# EAGLE board Hormiga_877_CH340G_Rev_C-Panel (EAGLE 9.6.1), part 1 of 4
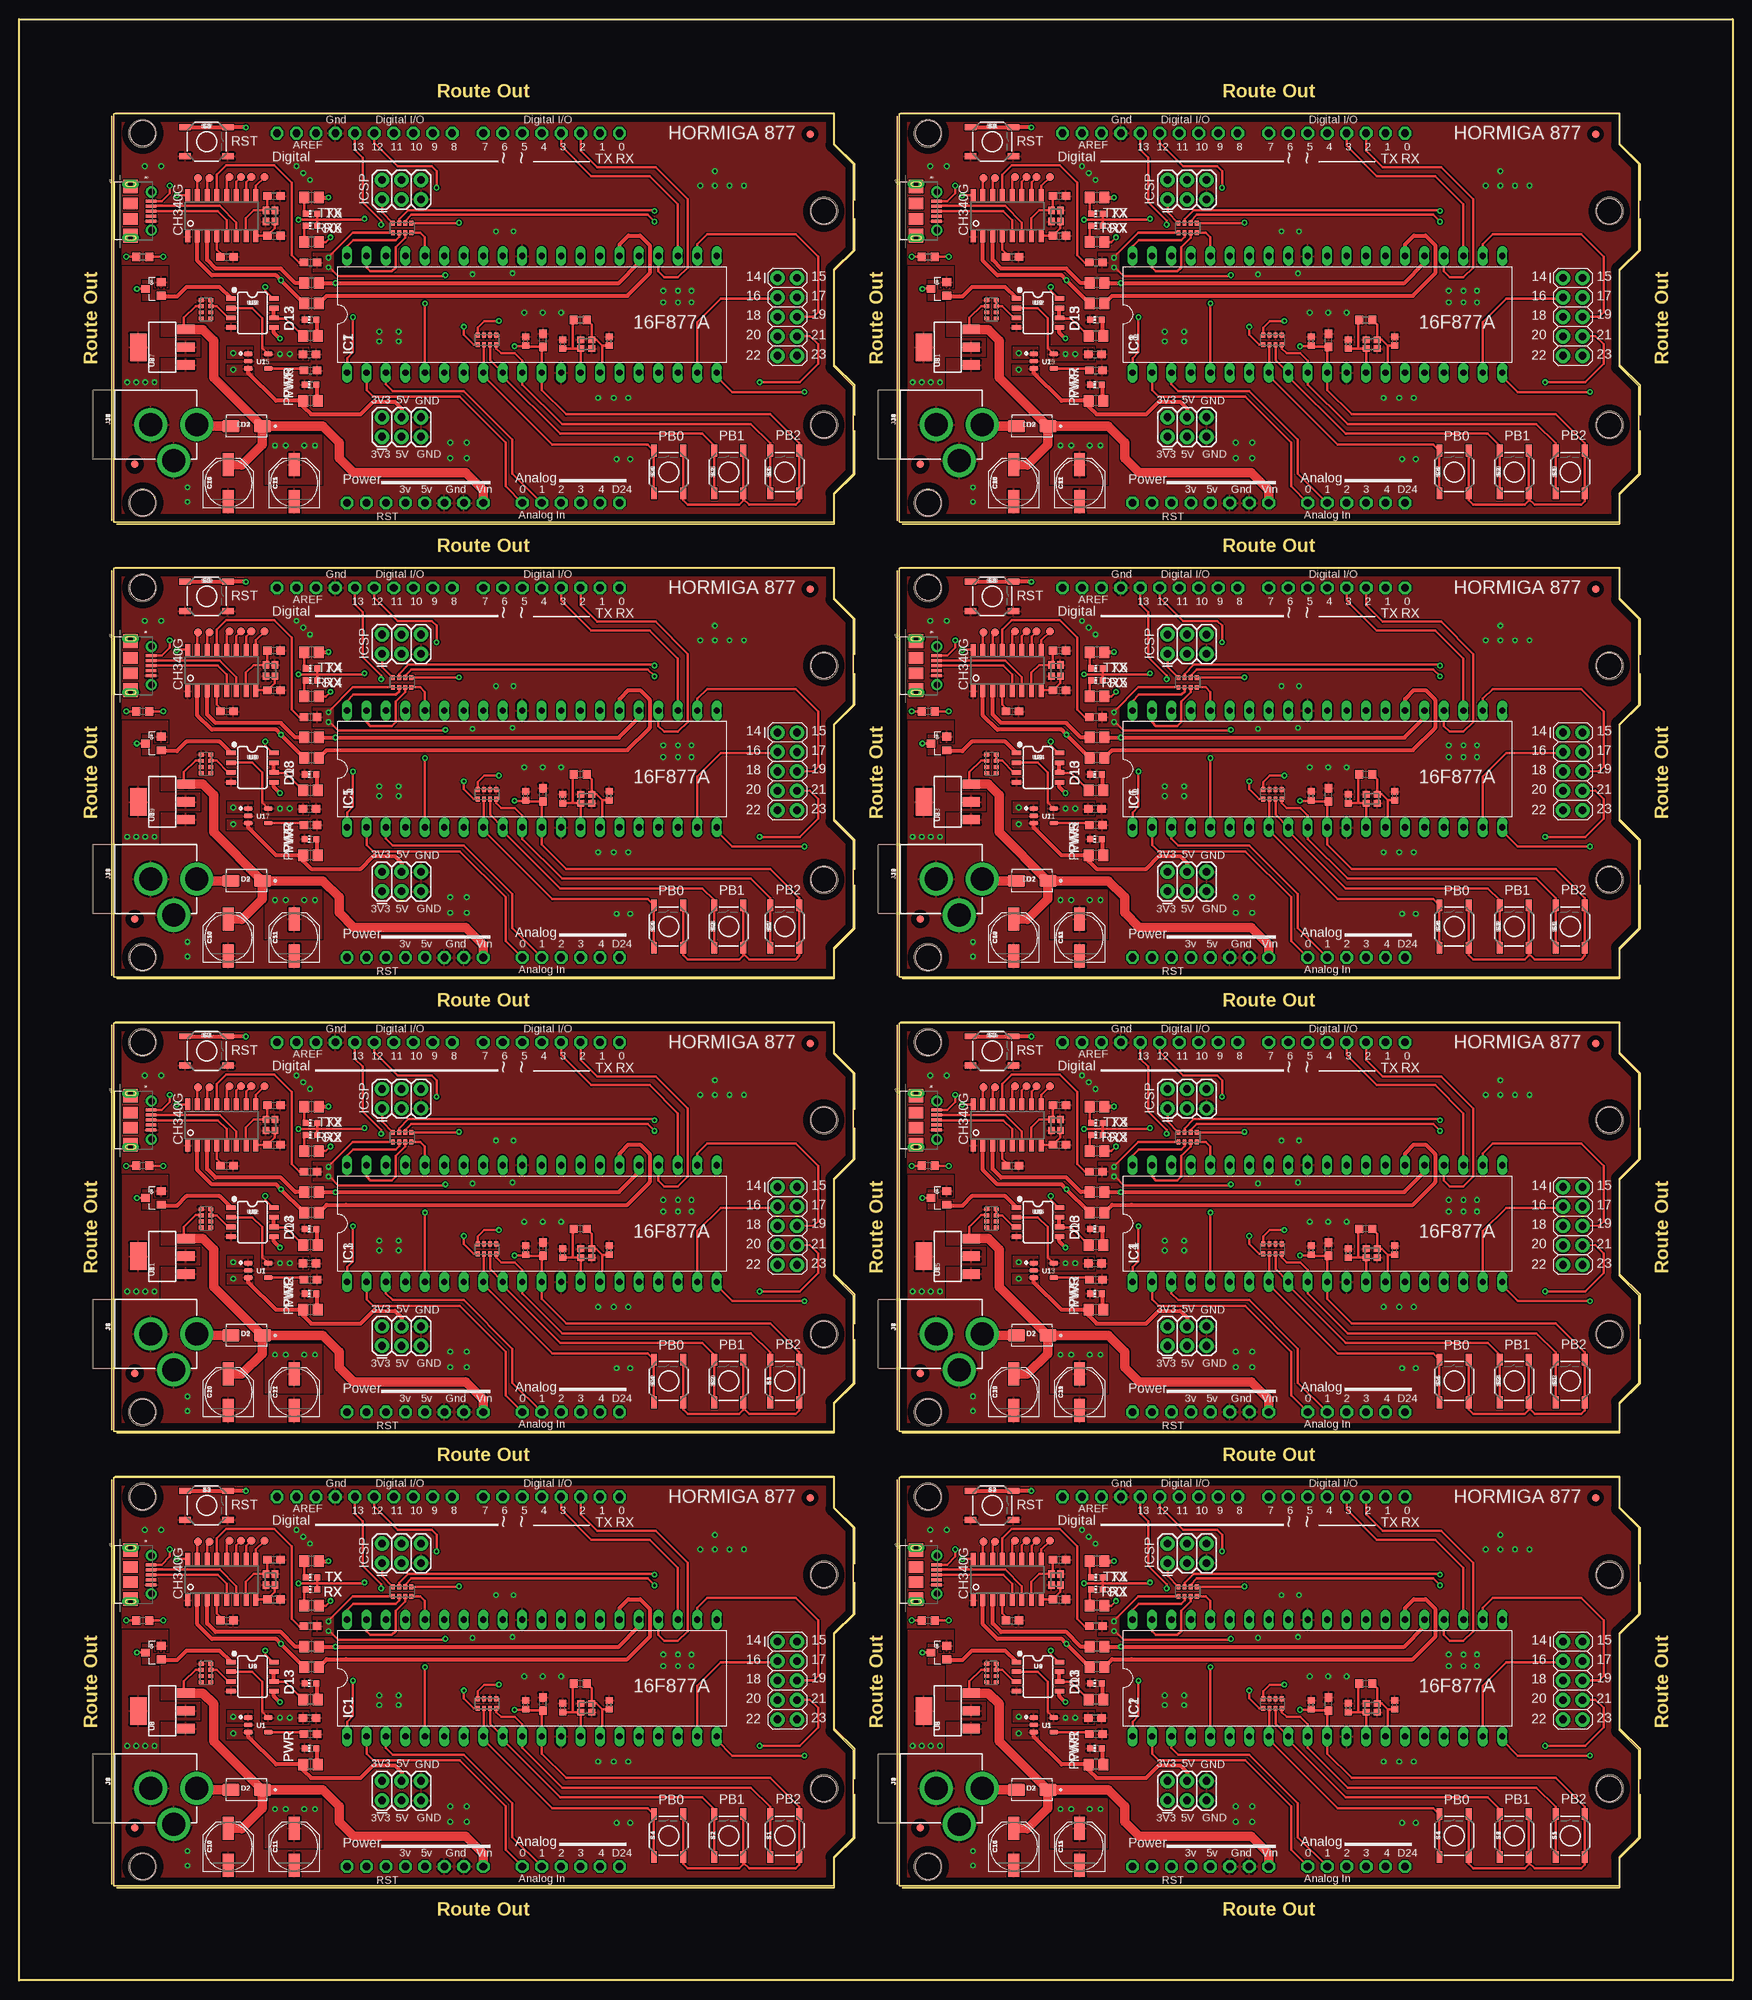
[diagram p0: board, top side]
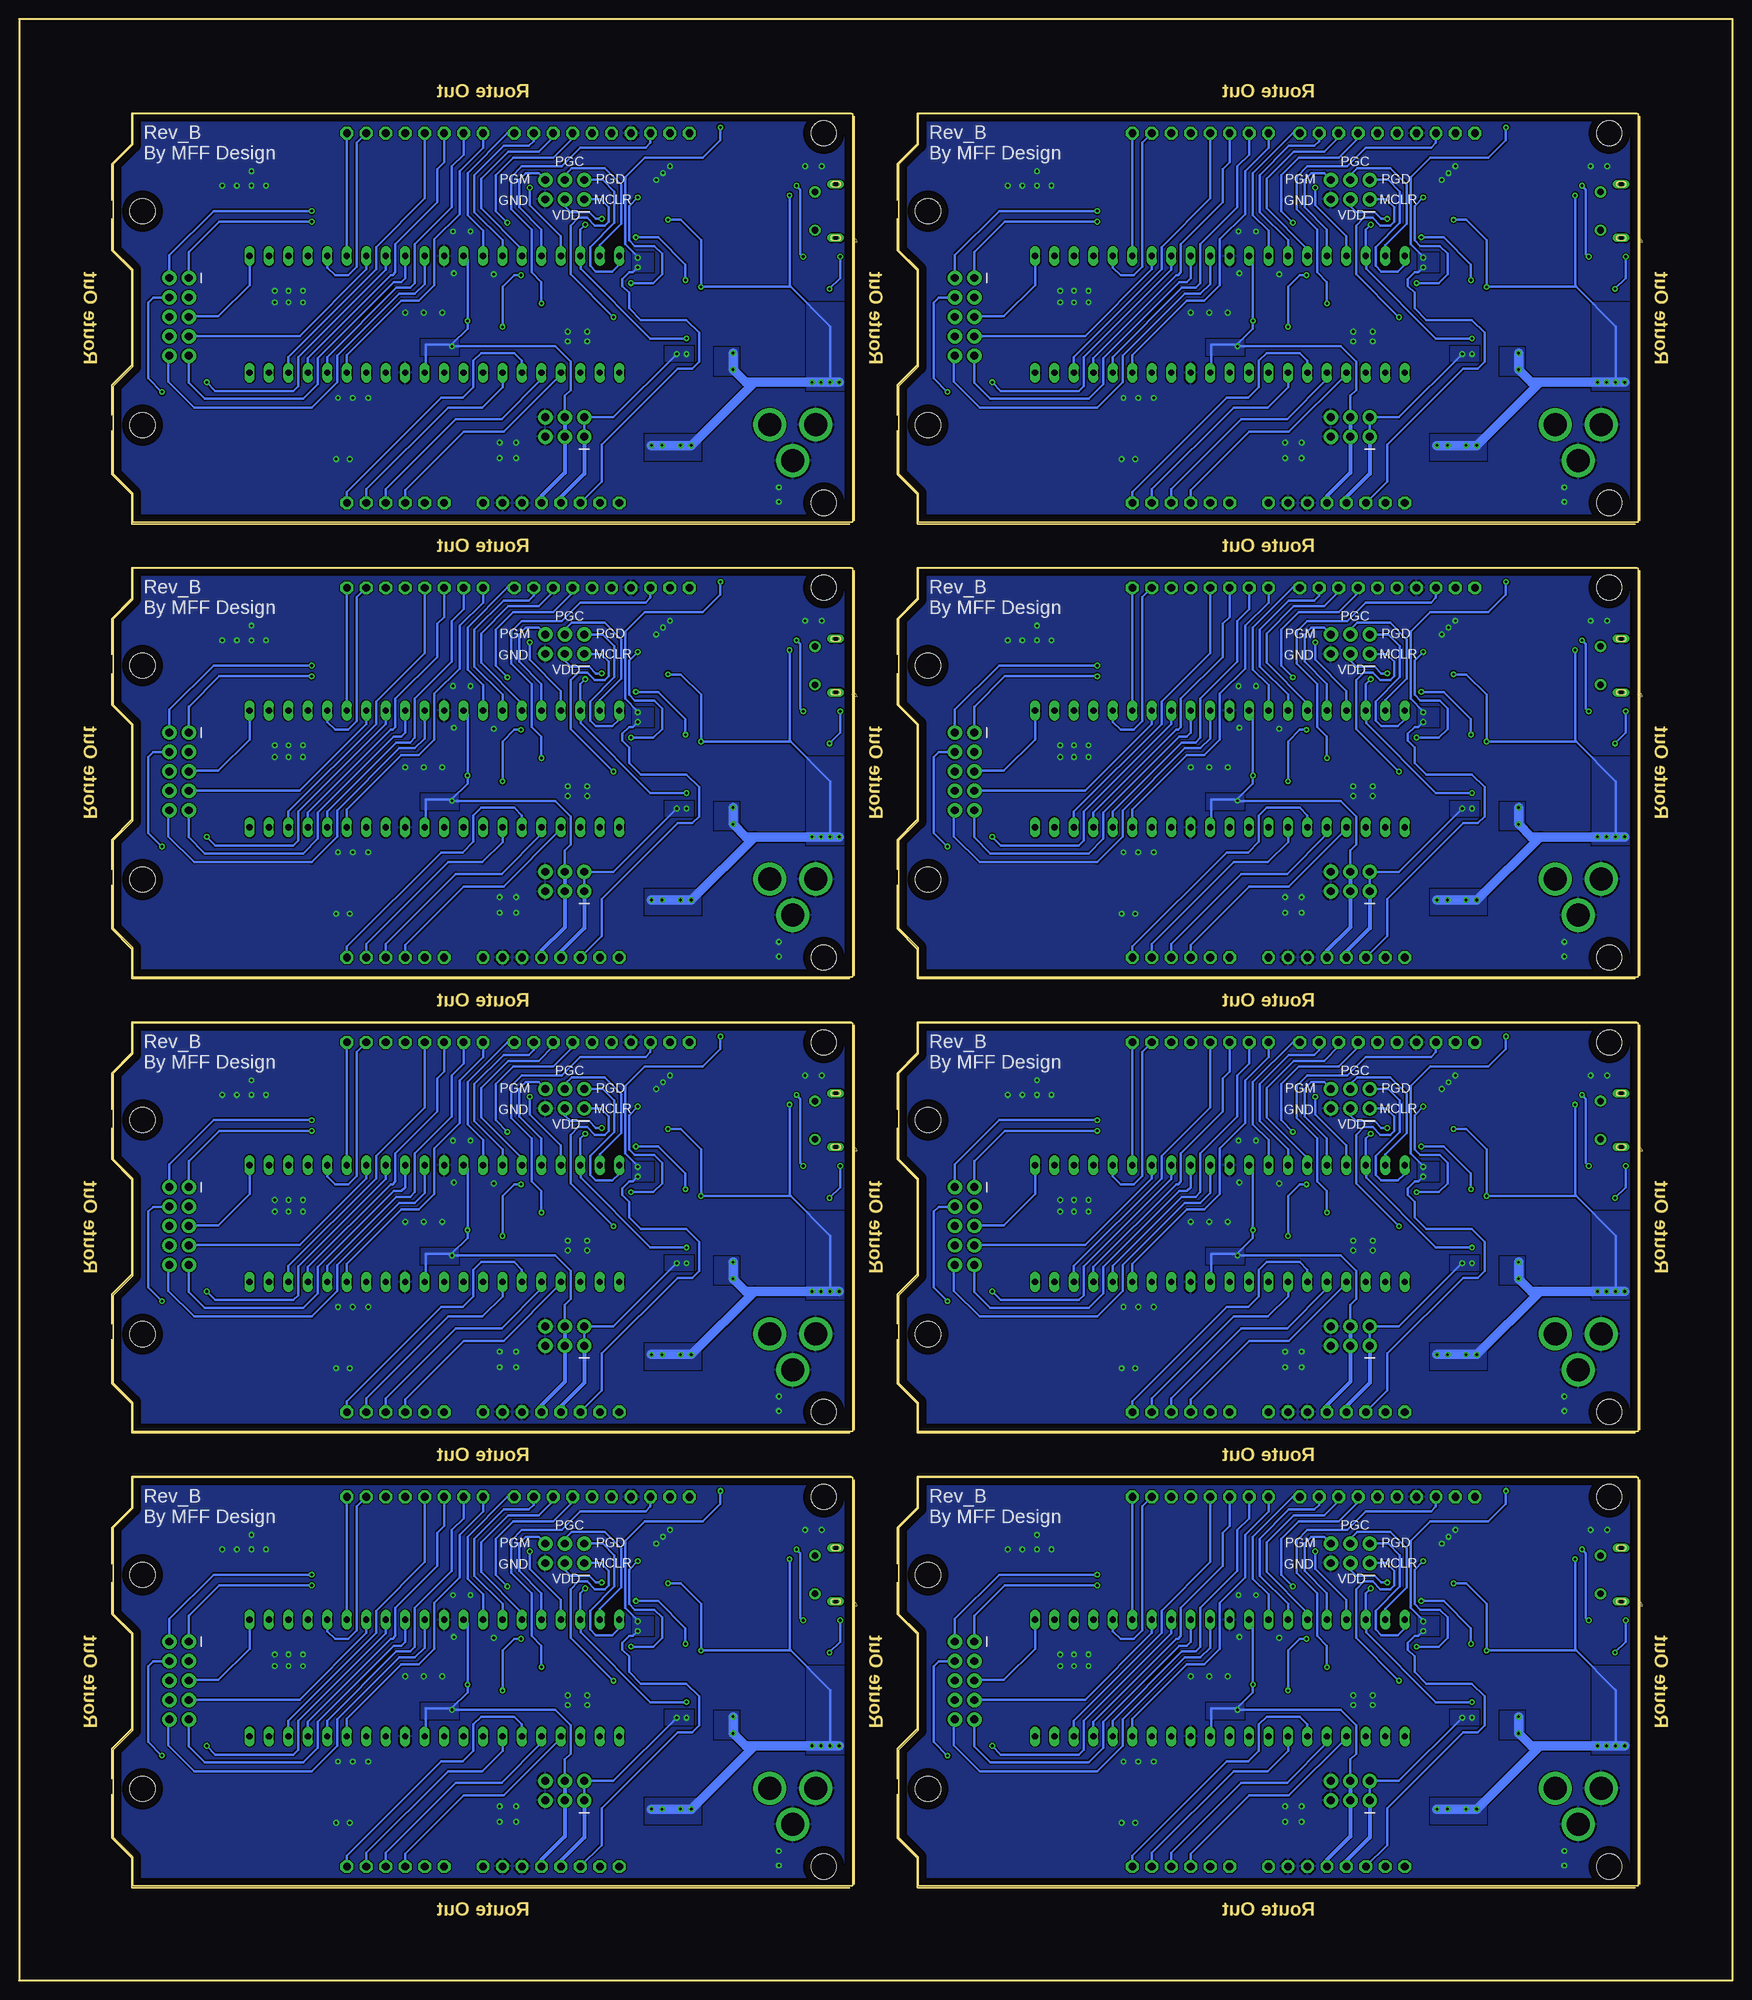
[diagram p1: board, bottom side, seen from below]

Size 223.65 x 256.03 mm. Coordinates in mm from the lower left corner, seen from the top.
Outline: 12.32,12.32 12.32,65.66 106.3,65.66 106.3,61.6 108.84,59.05 108.84,47.88 106.3,45.34 106.3,32.64 108.84,30.1 108.84,18.67 106.3,16.13 106.3,12.32 12.32,12.32
Outline: 114.84,12.32 114.84,65.66 208.82,65.66 208.82,61.6 211.36,59.05 211.36,47.88 208.82,45.34 208.82,32.64 211.36,30.1 211.36,18.67 208.82,16.13 208.82,12.32 114.84,12.32
Outline: 12.32,71.66 12.32,125 106.3,125 106.3,120.93 108.84,118.39 108.84,107.22 106.3,104.68 106.3,91.98 108.84,89.44 108.84,78.01 106.3,75.47 106.3,71.66 12.32,71.66
Outline: 114.84,71.66 114.84,125 208.82,125 208.82,120.93 211.36,118.39 211.36,107.22 208.82,104.68 208.82,91.98 211.36,89.44 211.36,78.01 208.82,75.47 208.82,71.66 114.84,71.66
Outline: 12.32,131 12.32,184.34 106.3,184.34 106.3,180.27 108.84,177.73 108.84,166.56 106.3,164.02 106.3,151.32 108.84,148.78 108.84,137.35 106.3,134.81 106.3,131 12.32,131
Outline: 114.84,131 114.84,184.34 208.82,184.34 208.82,180.27 211.36,177.73 211.36,166.56 208.82,164.02 208.82,151.32 211.36,148.78 211.36,137.35 208.82,134.81 208.82,131 114.84,131
Outline: 12.32,190.34 12.32,243.68 106.3,243.68 106.3,239.62 108.84,237.08 108.84,225.9 106.3,223.36 106.3,210.66 108.84,208.12 108.84,196.69 106.3,194.15 106.3,190.34 12.32,190.34
Outline: 114.84,190.34 114.84,243.68 208.82,243.68 208.82,239.62 211.36,237.08 211.36,225.9 208.82,223.36 208.82,210.66 211.36,208.12 211.36,196.69 208.82,194.15 208.82,190.34 114.84,190.34
Outline: 0,0 0,256.03 223.65,256.03 223.65,0 0,0
Copper layers (1*16): Top 0.035mm / dielectric 1.5mm / Bottom 0.035mm
Design rules "default": minimum track width 6mil, minimum drill 0.35mm, track to track 6mil, track to pad 6mil, pad to pad 6mil, via to via 6mil, smd to smd 6mil, copper to edge 40mil, drill to drill 6mil, minimum pad ring 10mil, minimum via ring 8mil, stop-mask expansion 4mil, vias tented up to drill 0mil, thermal gap 10mil
Net classes: 0 USBUART: width 0.3 mm, clearance 0.1 mm; 1 SIGNAL: width 0.53 mm, clearance 0.3 mm; 3 SIGNALPIC: width 0.53 mm, clearance 0.008 mm; 4 SIGNAL3V3: width 0.35 mm, clearance 0.15 mm
tRestrict: area 14.1,19 to 16,20.8; area 102.4,62.2 to 104,63.8; area 116.7,19 to 118.5,20.8; area 205,62.2 to 206.5,63.8; area 14.1,78.3 to 16,80.1; area 102.4,121.5 to 104,123.1; area 116.7,78.3 to 118.5,80.1; area 205,121.5 to 206.5,123.1; area 14.1,137.7 to 16,139.5; area 102.4,180.9 to 104,182.4; area 116.7,137.7 to 118.5,139.5; area 205,180.9 to 206.5,182.4; area 14.1,197 to 16,198.8; area 102.4,240.2 to 104,241.8; area 116.7,197 to 118.5,198.8; area 205,240.2 to 206.5,241.8
Milling: 112 lines

## Footprints (pad centres in the part's own frame; a part is rotated, then mirrored left to right if it is on the bottom)
0603 = smd 1.1 x 1: 1 -0.85,0; 2 0.85,0
0402 = smd 0.85 x 0.9: 1 -0.58,0; 2 0.58,0
C0603 = smd 1.1 x 1: 1 -0.85,0; 2 0.85,0
PANASONIC_D = smd 3 x 1.4: + 2.4,0; - -2.4,0
PAD.03X.04 = smd 1.016 x 1.016: P$1 0,0
CHIP-LED0603 = smd 0.8 x 0.8: A 0,-0.75; C 0,0.75
DIOM505270X240 = smd 2.21 x 1.53: A 2.05,0; C -2.05,0
TP10R = smd 1 x 1: TP 0,0
R0603 = smd 1 x 1.1: 1 -0.85,0; 2 0.85,0
2X5 = drill 1.016 pad 1.88: 1 0,0; 2 0,2.54; 3 2.54,0; 4 2.54,2.54; 5 5.08,0; 6 5.08,2.54; 7 7.62,0; 8 7.62,2.54; 9 10.16,0; 10 10.16,2.54
DIL40 = drill 0.813 long: 1 -24.13,-7.62; 2 -21.59,-7.62; 3 -19.05,-7.62; 4 -16.51,-7.62; 5 -13.97,-7.62; 6 -11.43,-7.62; 7 -8.89,-7.62; 8 -6.35,-7.62; 9 -3.81,-7.62; 10 -1.27,-7.62; 11 1.27,-7.62; 12 3.81,-7.62; 13 6.35,-7.62; 14 8.89,-7.62; 15 11.43,-7.62; 16 13.97,-7.62; 17 16.51,-7.62; 18 19.05,-7.62; 19 21.59,-7.62; 20 24.13,-7.62; 21 24.13,7.62; 22 21.59,7.62; 23 19.05,7.62; 24 16.51,7.62; 25 13.97,7.62; 26 11.43,7.62; 27 8.89,7.62; 28 6.35,7.62; 29 3.81,7.62; 30 1.27,7.62; 31 -1.27,7.62; 32 -3.81,7.62; 33 -6.35,7.62; 34 -8.89,7.62; 35 -11.43,7.62; 36 -13.97,7.62; 37 -16.51,7.62; 38 -19.05,7.62; 39 -21.59,7.62; 40 -24.13,7.62
2X3 = drill 1.016 pad 1.88: 1 0,0; 2 0,2.54; 3 2.54,0; 4 2.54,2.54; 5 5.08,0; 6 5.08,2.54
MOLEX_105017-0001 = smd 0.4 x 1.35: 1 -1.3,2.675; 2 -0.65,2.675; 3 0,2.675; 4 0.65,2.675; 5 1.3,2.675 | drill 0.85 pad 1.45: P$1 -2.5,2.7; P$2 2.5,2.7 | smd 1.5 x 1.9: P$8 -1,0; P$9 1,0 | smd 1.8 x 1.9: P$10 -3.2,0; P$11 3.2,0 | drill 0.6 pad 0.8 long: P$12 -3.5,0; P$13 3.5,0
POWER_JACK_PTH = drill 2.997 pad 4.318: GND 0,7.7; GNDBREAK 4.7,10.7; PWR 0,13.7
FA-128 = smd 0.95 x 0.85: 1 -0.725,-0.575; 2 0.725,-0.575; 3 0.725,0.575; 4 -0.725,0.575
SOT-23 = smd 1.016 x 1.143: 1 -0.889,-1.016; 2 0.889,-1.016; 3 0,1.016
R0805 = smd 1.3 x 1.5: 1 -0.95,0; 2 0.95,0
0603-ARC = smd 0.5 x 0.65: 1 -1.2,-0.625; 2 -0.4,-0.625; 3 0.4,-0.625; 4 1.2,-0.625; 5 1.2,0.625; 6 0.4,0.625; 7 -0.4,0.625; 8 -1.2,0.625
TACTILE_SWITCH_SMD_5.2MM = smd 1.524 x 0.762: 1 -2.794,1.905; 2 2.794,1.905; 3 -2.794,-1.905; 4 2.794,-1.905
SOT95P280X145-5N = smd 1.1 x 0.6: 1 -1.3,0.95; 2 -1.3,0; 3 -1.3,-0.95; 4 1.3,-0.95; 5 1.3,0.95
ARDUINOR3 = drill 1 pad 1.676 octagon: 3V 38.1,2.54; 5V 40.64,2.54; A0 53.34,2.54; A1 55.88,2.54; A2 58.42,2.54; A3 60.96,2.54; A4 63.5,2.54; A5 66.04,2.54; AREF 26.416,50.8; D0 66.04,50.8; D1 63.5,50.8; D2 60.96,50.8; D3 58.42,50.8; D4 55.88,50.8; D5 53.34,50.8; D6 50.8,50.8; D7 48.26,50.8; D8 44.196,50.8; D9 41.656,50.8; D10 39.116,50.8; D11 36.576,50.8; D12 34.036,50.8; D13 31.496,50.8; GND 28.956,50.8; GND1 45.72,2.54; GND2 43.18,2.54; IOREF 33.02,2.54; RESERVED 30.48,2.54; RESET 35.56,2.54; SCL 21.336,50.8; SDA 23.876,50.8; VIN 48.26,2.54 | hole 3.302: 3.81,50.8; 3.81,2.54; 92.71,12.7; 92.71,40.64
SOT223 = smd 1.219 x 2.235: 1 -2.311,-3.099; 2 0,-3.099; 3 2.311,-3.099 | smd 3.6 x 2.2: 4 0,3.099
SO08 = smd 0.6 x 1.2: 1 -1.905,-2.8; 2 -0.635,-2.8; 3 0.635,-2.8; 4 1.905,-2.8; 5 1.905,2.8; 6 0.635,2.8; 7 -0.635,2.8; 8 -1.905,2.8
SOIC16 = smd 0.635 x 1.524: 1 -4.445,-2.695; 2 -3.175,-2.695; 3 -1.905,-2.695; 4 -0.635,-2.695; 5 0.635,-2.695; 6 1.905,-2.695; 7 3.175,-2.695; 8 4.445,-2.695; 9 4.445,2.695; 10 3.175,2.695; 11 1.905,2.695; 12 0.635,2.695; 13 -0.635,2.695; 14 -1.905,2.695; 15 -3.175,2.695; 16 -4.445,2.695

## Placement (x,y rotation side)
C1  1.0uF  [0603]  37.9,34.26 0 top
C2  15pF  [0402]  70.94,35.59 90 top
C3  15pF  [0402]  77.01,35.97 90 top
C4  10nF  [0603]  38.02,32.15 0 top
C5  22pF  [C0603]  33.24,54.91 0 top
C6  22pF  [C0603]  33.24,49.73 0 top
C7  1.0uF  [0603]  140.42,34.26 0 top
C8  10uF  [C0603]  68.38,36.09 90 top
C9  0.1uF  [C0603]  38.02,46.24 0 top
C10  47uF  [PANASONIC_D]  27.3,17.45 90 top
C11  47uF  [PANASONIC_D]  35.89,17.45 90 top
C12  0.1uF  [0402]  66.12,35.97 90 top
C13  15pF  [C0603]  27.1,46.99 0 top
C14  47uF  [PANASONIC_D]  129.82,17.45 90 top
C15  47uF  [PANASONIC_D]  138.41,17.45 90 top
C16  0.1uF  [0402]  168.64,35.97 90 top
C17  15pF  [C0603]  129.62,46.99 0 top
C18  15pF  [0402]  173.46,35.59 90 top
C19  15pF  [0402]  179.53,35.97 90 top
C20  10nF  [0603]  140.54,32.15 0 top
C21  22pF  [C0603]  135.76,54.91 0 top
C22  22pF  [C0603]  135.76,49.73 0 top
C23  10uF  [C0603]  170.9,36.09 90 top
C24  0.1uF  [C0603]  140.54,46.24 0 top
C25  1.0uF  [0603]  37.9,93.6 0 top
C26  47uF  [PANASONIC_D]  27.3,76.79 90 top
C27  47uF  [PANASONIC_D]  35.89,76.79 90 top
C28  0.1uF  [0402]  66.12,95.31 90 top
C29  15pF  [C0603]  27.1,106.33 0 top
C30  15pF  [0402]  70.94,94.92 90 top
C31  15pF  [0402]  77.01,95.31 90 top
C32  10nF  [0603]  38.02,91.49 0 top
C33  22pF  [C0603]  33.24,114.25 0 top
C34  22pF  [C0603]  33.24,109.07 0 top
C35  10uF  [C0603]  68.38,95.43 90 top
C36  0.1uF  [C0603]  38.02,105.58 0 top
C37  1.0uF  [0603]  140.42,93.6 0 top
C38  47uF  [PANASONIC_D]  129.82,76.79 90 top
C39  47uF  [PANASONIC_D]  138.41,76.79 90 top
C40  0.1uF  [0402]  168.64,95.31 90 top
C41  15pF  [C0603]  129.62,106.33 0 top
C42  15pF  [0402]  173.46,94.92 90 top
C43  15pF  [0402]  179.53,95.31 90 top
C44  10nF  [0603]  140.54,91.49 0 top
C45  22pF  [C0603]  135.76,114.25 0 top
C46  22pF  [C0603]  135.76,109.07 0 top
C47  10uF  [C0603]  170.9,95.43 90 top
C48  0.1uF  [C0603]  140.54,105.58 0 top
C49  1.0uF  [0603]  37.9,152.94 0 top
C50  47uF  [PANASONIC_D]  27.3,136.13 90 top
C51  47uF  [PANASONIC_D]  35.89,136.13 90 top
C52  0.1uF  [0402]  66.12,154.65 90 top
C53  15pF  [C0603]  27.1,165.67 0 top
C54  15pF  [0402]  70.94,154.26 90 top
C55  15pF  [0402]  77.01,154.65 90 top
C56  10nF  [0603]  38.02,150.83 0 top
C57  22pF  [C0603]  33.24,173.59 0 top
C58  22pF  [C0603]  33.24,168.41 0 top
C59  10uF  [C0603]  68.38,154.77 90 top
C60  0.1uF  [C0603]  38.02,164.92 0 top
C61  1.0uF  [0603]  140.42,152.94 0 top
C62  47uF  [PANASONIC_D]  129.82,136.13 90 top
C63  47uF  [PANASONIC_D]  138.41,136.13 90 top
C64  0.1uF  [0402]  168.64,154.65 90 top
C65  15pF  [C0603]  129.62,165.67 0 top
C66  15pF  [0402]  173.46,154.26 90 top
C67  15pF  [0402]  179.53,154.65 90 top
C68  10nF  [0603]  140.54,150.83 0 top
C69  22pF  [C0603]  135.76,173.59 0 top
C70  22pF  [C0603]  135.76,168.41 0 top
C71  10uF  [C0603]  170.9,154.77 90 top
C72  0.1uF  [C0603]  140.54,164.92 0 top
C73  1.0uF  [0603]  37.9,212.28 0 top
C74  47uF  [PANASONIC_D]  27.3,195.47 90 top
C75  47uF  [PANASONIC_D]  35.89,195.47 90 top
C76  0.1uF  [0402]  66.12,213.99 90 top
C77  15pF  [C0603]  27.1,225.01 0 top
C78  15pF  [0402]  70.94,213.61 90 top
C79  15pF  [0402]  77.01,213.99 90 top
C80  10nF  [0603]  38.02,210.17 0 top
C81  22pF  [C0603]  33.24,232.94 0 top
C82  22pF  [C0603]  33.24,227.75 0 top
C83  10uF  [C0603]  68.38,214.11 90 top
C84  0.1uF  [C0603]  38.02,224.27 0 top
C85  1.0uF  [0603]  140.42,212.28 0 top
C86  47uF  [PANASONIC_D]  129.82,195.47 90 top
C87  47uF  [PANASONIC_D]  138.41,195.47 90 top
C88  0.1uF  [0402]  168.64,213.99 90 top
C89  15pF  [C0603]  129.62,225.01 0 top
C90  15pF  [0402]  173.46,213.61 90 top
C91  15pF  [0402]  179.53,213.99 90 top
C92  10nF  [0603]  140.54,210.17 0 top
C93  22pF  [C0603]  135.76,232.94 0 top
C94  22pF  [C0603]  135.76,227.75 0 top
C95  10uF  [C0603]  170.9,214.11 90 top
C96  0.1uF  [C0603]  140.54,224.27 0 top
CTS  TEST-POINT3X4  [PAD.03X.04]  32.03,57.4 0 top
CTS1  TEST-POINT3X4  [PAD.03X.04]  134.55,57.4 0 top
CTS2  TEST-POINT3X4  [PAD.03X.04]  32.03,116.74 0 top
CTS3  TEST-POINT3X4  [PAD.03X.04]  134.55,116.74 0 top
CTS4  TEST-POINT3X4  [PAD.03X.04]  32.03,176.08 0 top
CTS5  TEST-POINT3X4  [PAD.03X.04]  134.55,176.08 0 top
CTS6  TEST-POINT3X4  [PAD.03X.04]  32.03,235.42 0 top
CTS7  TEST-POINT3X4  [PAD.03X.04]  134.55,235.42 0 top
D1  GRN  [CHIP-LED0603]  140.54,38.77 90 top
D2  M7  [DIOM505270X240]  29.69,24.87 180 top
D3  M7  [DIOM505270X240]  132.21,24.87 180 top
D4  GRN  [CHIP-LED0603]  38.02,98.11 90 top
D5  M7  [DIOM505270X240]  29.69,84.21 180 top
D6  GRN  [CHIP-LED0603]  140.54,98.11 90 top
D7  M7  [DIOM505270X240]  132.21,84.21 180 top
D8  GRN  [CHIP-LED0603]  38.02,157.45 90 top
D9  M7  [DIOM505270X240]  29.69,143.55 180 top
D10  GRN  [CHIP-LED0603]  140.54,157.45 90 top
D11  M7  [DIOM505270X240]  132.21,143.55 180 top
D12  GRN  [CHIP-LED0603]  38.02,216.79 90 top
D13  GRN  [CHIP-LED0603]  38.02,38.77 90 top
D14  M7  [DIOM505270X240]  29.69,202.89 180 top
D15  GRN  [CHIP-LED0603]  140.54,216.79 90 top
D16  M7  [DIOM505270X240]  132.21,202.89 180 top
DCD  TEST-POINT3X4  [PAD.03X.04]  27.45,57.4 0 top
DCD1  TEST-POINT3X4  [PAD.03X.04]  129.97,57.4 0 top
DCD2  TEST-POINT3X4  [PAD.03X.04]  27.45,116.74 0 top
DCD3  TEST-POINT3X4  [PAD.03X.04]  129.97,116.74 0 top
DCD4  TEST-POINT3X4  [PAD.03X.04]  27.45,176.08 0 top
DCD5  TEST-POINT3X4  [PAD.03X.04]  129.97,176.08 0 top
DCD6  TEST-POINT3X4  [PAD.03X.04]  27.45,235.42 0 top
DCD7  TEST-POINT3X4  [PAD.03X.04]  129.97,235.42 0 top
DSR  TEST-POINT3X4  [PAD.03X.04]  30.29,57.4 0 top
DSR1  TEST-POINT3X4  [PAD.03X.04]  132.81,57.4 0 top
DSR2  TEST-POINT3X4  [PAD.03X.04]  30.29,116.74 0 top
DSR3  TEST-POINT3X4  [PAD.03X.04]  132.81,116.74 0 top
DSR4  TEST-POINT3X4  [PAD.03X.04]  30.29,176.08 0 top
DSR5  TEST-POINT3X4  [PAD.03X.04]  132.81,176.08 0 top
DSR6  TEST-POINT3X4  [PAD.03X.04]  30.29,235.42 0 top
DSR7  TEST-POINT3X4  [PAD.03X.04]  132.81,235.42 0 top
F1  TPSQTP10R  [TP10R]  117.58,19.89 0 top
F2  TPSQTP10R  [TP10R]  15.06,19.89 0 top
F3  TPSQTP10R  [TP10R]  103.23,62.97 0 top
F4  TPSQTP10R  [TP10R]  205.75,62.97 0 top
F5  TPSQTP10R  [TP10R]  15.06,79.23 0 top
F6  TPSQTP10R  [TP10R]  103.23,122.31 0 top
F7  TPSQTP10R  [TP10R]  117.58,79.23 0 top
F8  TPSQTP10R  [TP10R]  205.75,122.31 0 top
F9  TPSQTP10R  [TP10R]  15.06,138.57 0 top
F10  TPSQTP10R  [TP10R]  103.23,181.65 0 top
F11  TPSQTP10R  [TP10R]  117.58,138.57 0 top
F12  TPSQTP10R  [TP10R]  205.75,181.65 0 top
F13  TPSQTP10R  [TP10R]  15.06,197.91 0 top
F14  TPSQTP10R  [TP10R]  103.23,240.99 0 top
F15  TPSQTP10R  [TP10R]  117.58,197.91 0 top
F16  TPSQTP10R  [TP10R]  205.75,240.99 0 top
FUSE  FUSE0603  [R0603]  16.13,46.99 180 top
FUSE1  FUSE0603  [R0603]  118.65,46.99 180 top
FUSE2  FUSE0603  [R0603]  16.13,106.33 180 top
FUSE3  FUSE0603  [R0603]  118.65,106.33 180 top
FUSE4  FUSE0603  [R0603]  16.13,165.67 180 top
FUSE5  FUSE0603  [R0603]  118.65,165.67 180 top
FUSE6  FUSE0603  [R0603]  16.13,225.01 180 top
FUSE7  FUSE0603  [R0603]  118.65,225.01 180 top
GPIO  [2X5]  98.98,44.22 270 top
GPIO1  [2X5]  201.5,44.22 270 top
GPIO2  [2X5]  98.98,103.56 270 top
GPIO3  [2X5]  201.5,103.56 270 top
GPIO4  [2X5]  98.98,162.9 270 top
GPIO5  [2X5]  201.5,162.9 270 top
GPIO6  [2X5]  98.98,222.24 270 top
GPIO7  [2X5]  201.5,222.24 270 top
IC1  PIC18F4550_40  [DIL40]  66.93,39.47 0 top
IC2  PIC18F4550_40  [DIL40]  169.45,39.47 0 top
IC3  PIC18F4550_40  [DIL40]  66.93,98.8 0 top
IC4  PIC18F4550_40  [DIL40]  169.45,98.8 0 top
IC5  PIC18F4550_40  [DIL40]  66.93,158.14 0 top
IC6  PIC18F4550_40  [DIL40]  169.45,158.14 0 top
IC7  PIC18F4550_40  [DIL40]  66.93,217.49 0 top
IC8  PIC18F4550_40  [DIL40]  169.45,217.49 0 top
ICSP  icsp  [2X3]  47.37,54.48 0 top
ICSP1  icsp  [2X3]  149.89,54.48 0 top
ICSP2  icsp  [2X3]  47.37,113.82 0 top
ICSP3  icsp  [2X3]  149.89,113.82 0 top
ICSP4  icsp  [2X3]  47.37,173.16 0 top
ICSP5  icsp  [2X3]  149.89,173.16 0 top
ICSP6  icsp  [2X3]  47.37,232.5 0 top
ICSP7  icsp  [2X3]  149.89,232.5 0 top
J1  105017-0001  [MOLEX_105017-0001]  117.07,52.96 270 top
J2  POWER_JACK  [POWER_JACK_PTH]  111.99,25.07 270 top
J3  105017-0001  [MOLEX_105017-0001]  14.55,52.96 270 top
J4  105017-0001  [MOLEX_105017-0001]  14.55,112.3 270 top
J5  POWER_JACK  [POWER_JACK_PTH]  9.47,84.41 270 top
J6  105017-0001  [MOLEX_105017-0001]  117.07,112.3 270 top
J7  POWER_JACK  [POWER_JACK_PTH]  111.99,84.41 270 top
J8  POWER_JACK  [POWER_JACK_PTH]  9.47,25.07 270 top
J9  105017-0001  [MOLEX_105017-0001]  14.55,171.64 270 top
J10  POWER_JACK  [POWER_JACK_PTH]  9.47,143.75 270 top
J11  105017-0001  [MOLEX_105017-0001]  117.07,171.64 270 top
J12  POWER_JACK  [POWER_JACK_PTH]  111.99,143.75 270 top
J13  105017-0001  [MOLEX_105017-0001]  14.55,230.98 270 top
J14  POWER_JACK  [POWER_JACK_PTH]  9.47,203.09 270 top
J15  105017-0001  [MOLEX_105017-0001]  117.07,230.98 270 top
J16  POWER_JACK  [POWER_JACK_PTH]  111.99,203.09 270 top
POWER  POWER  [2X3]  47.37,23.5 0 top
POWER1  POWER  [2X3]  149.89,23.5 0 top
POWER2  POWER  [2X3]  47.37,82.83 0 top
POWER3  POWER  [2X3]  149.89,82.83 0 top
POWER4  POWER  [2X3]  47.37,142.17 0 top
POWER5  POWER  [2X3]  149.89,142.17 0 top
POWER6  POWER  [2X3]  47.37,201.52 0 top
POWER7  POWER  [2X3]  149.89,201.52 0 top
PWR  GRN  [CHIP-LED0603]  38.02,30.31 90 top
PWR1  GRN  [CHIP-LED0603]  140.54,30.31 90 top
PWR2  GRN  [CHIP-LED0603]  38.02,89.65 90 top
PWR3  GRN  [CHIP-LED0603]  140.54,89.65 90 top
PWR4  GRN  [CHIP-LED0603]  38.02,148.99 90 top
PWR5  GRN  [CHIP-LED0603]  140.54,148.99 90 top
PWR6  GRN  [CHIP-LED0603]  38.02,208.33 90 top
PWR7  GRN  [CHIP-LED0603]  140.54,208.33 90 top
Q1  FA-128_20MHz  [FA-128]  74.02,35.59 0 top
Q2  FA-128_12MHz  [FA-128]  32.79,52.32 270 top
Q3  SMD-MOSFET-P-CH-20V-2A(SOT-23)  [SOT-23]  17.52,42.8 90 top
Q4  FA-128_20MHz  [FA-128]  176.54,35.59 0 top
Q5  FA-128_12MHz  [FA-128]  135.31,52.32 270 top
Q6  SMD-MOSFET-P-CH-20V-2A(SOT-23)  [SOT-23]  120.04,42.8 90 top
Q7  FA-128_20MHz  [FA-128]  74.02,94.93 0 top
Q8  FA-128_12MHz  [FA-128]  32.79,111.66 270 top
Q9  SMD-MOSFET-P-CH-20V-2A(SOT-23)  [SOT-23]  17.52,102.14 90 top
Q10  FA-128_20MHz  [FA-128]  176.54,94.93 0 top
Q11  FA-128_12MHz  [FA-128]  135.31,111.66 270 top
Q12  SMD-MOSFET-P-CH-20V-2A(SOT-23)  [SOT-23]  120.04,102.14 90 top
Q13  FA-128_20MHz  [FA-128]  74.02,154.26 0 top
Q14  FA-128_12MHz  [FA-128]  32.79,171 270 top
Q15  SMD-MOSFET-P-CH-20V-2A(SOT-23)  [SOT-23]  17.52,161.48 90 top
Q16  FA-128_20MHz  [FA-128]  176.54,154.26 0 top
Q17  FA-128_12MHz  [FA-128]  135.31,171 270 top
Q18  SMD-MOSFET-P-CH-20V-2A(SOT-23)  [SOT-23]  120.04,161.48 90 top
Q19  FA-128_20MHz  [FA-128]  74.02,213.61 0 top
Q20  FA-128_12MHz  [FA-128]  32.79,230.35 270 top
Q21  SMD-MOSFET-P-CH-20V-2A(SOT-23)  [SOT-23]  17.52,220.82 90 top
Q22  FA-128_20MHz  [FA-128]  176.54,213.61 0 top
Q23  FA-128_12MHz  [FA-128]  135.31,230.35 270 top
Q24  SMD-MOSFET-P-CH-20V-2A(SOT-23)  [SOT-23]  120.04,220.82 90 top
R1  330R  [R0805]  38.02,36.65 180 top
R2  1K  [R0805]  38.15,43.57 180 top
R3  1K  [R0805]  38.15,40.89 180 top
R4  1M  [R0603]  73.23,38.76 0 top
R5  330R  [R0805]  38.15,54.72 180 top
R6  330R  [R0805]  38.15,48.92 180 top
R7  470  [R0805]  38.02,28.19 180 top
R8  330R  [R0805]  140.54,36.65 180 top
R9  1K  [R0805]  140.67,43.57 180 top
R10  1K  [R0805]  140.67,40.89 180 top
R11  1M  [R0603]  175.75,38.76 0 top
R12  330R  [R0805]  140.67,54.72 180 top
R13  330R  [R0805]  140.67,48.92 180 top
R14  470  [R0805]  140.54,28.19 180 top
R15  330R  [R0805]  38.02,95.99 180 top
R16  1K  [R0805]  38.15,102.91 180 top
R17  1K  [R0805]  38.15,100.23 180 top
R18  1M  [R0603]  73.23,98.1 0 top
R19  330R  [R0805]  38.15,114.06 180 top
R20  330R  [R0805]  38.15,108.26 180 top
R21  470  [R0805]  38.02,87.53 180 top
R22  330R  [R0805]  140.54,95.99 180 top
R23  1K  [R0805]  140.67,102.91 180 top
R24  1K  [R0805]  140.67,100.23 180 top
R25  1M  [R0603]  175.75,98.1 0 top
R26  330R  [R0805]  140.67,114.06 180 top
R27  330R  [R0805]  140.67,108.26 180 top
R28  470  [R0805]  140.54,87.53 180 top
R29  330R  [R0805]  38.02,155.33 180 top
R30  1K  [R0805]  38.15,162.25 180 top
R31  1K  [R0805]  38.15,159.57 180 top
R32  1M  [R0603]  73.23,157.44 0 top
R33  330R  [R0805]  38.15,173.4 180 top
R34  330R  [R0805]  38.15,167.6 180 top
R35  470  [R0805]  38.02,146.87 180 top
R36  330R  [R0805]  140.54,155.33 180 top
R37  1K  [R0805]  140.67,162.25 180 top
R38  1K  [R0805]  140.67,159.57 180 top
R39  1M  [R0603]  175.75,157.44 0 top
R40  330R  [R0805]  140.67,173.4 180 top
R41  330R  [R0805]  140.67,167.6 180 top
R42  470  [R0805]  140.54,146.87 180 top
R43  330R  [R0805]  38.02,214.67 180 top
R44  1K  [R0805]  38.15,221.59 180 top
R45  1K  [R0805]  38.15,218.91 180 top
R46  1M  [R0603]  73.23,216.78 0 top
R47  330R  [R0805]  38.15,232.74 180 top
R48  330R  [R0805]  38.15,226.94 180 top
R49  470  [R0805]  38.02,206.21 180 top
R50  330R  [R0805]  140.54,214.67 180 top
R51  1K  [R0805]  140.67,221.59 180 top
R52  1K  [R0805]  140.67,218.91 180 top
R53  1M  [R0603]  175.75,216.78 0 top
R54  330R  [R0805]  140.67,232.74 180 top
R55  330R  [R0805]  140.67,226.94 180 top
R56  470  [R0805]  140.54,206.21 180 top
RI  TEST-POINT3X4  [PAD.03X.04]  28.94,57.4 0 top
RI1  TEST-POINT3X4  [PAD.03X.04]  131.46,57.4 0 top
RI2  TEST-POINT3X4  [PAD.03X.04]  28.94,116.74 0 top
RI3  TEST-POINT3X4  [PAD.03X.04]  131.46,116.74 0 top
RI4  TEST-POINT3X4  [PAD.03X.04]  28.94,176.08 0 top
RI5  TEST-POINT3X4  [PAD.03X.04]  131.46,176.08 0 top
RI6  TEST-POINT3X4  [PAD.03X.04]  28.94,235.42 0 top
RI7  TEST-POINT3X4  [PAD.03X.04]  131.46,235.42 0 top
RN1  10K  [0603-ARC]  61.06,36.14 0 top
RN2  100  [0603-ARC]  49.99,50.75 0 top
RN3  10K  [0603-ARC]  24.38,40.13 90 top
RN4  10K  [0603-ARC]  163.58,36.14 0 top
RN5  100  [0603-ARC]  152.51,50.75 0 top
RN6  10K  [0603-ARC]  126.9,40.13 90 top
RN7  10K  [0603-ARC]  61.06,95.48 0 top
RN8  100  [0603-ARC]  49.99,110.09 0 top
RN9  10K  [0603-ARC]  24.38,99.47 90 top
RN10  10K  [0603-ARC]  163.58,95.48 0 top
RN11  100  [0603-ARC]  152.51,110.09 0 top
RN12  10K  [0603-ARC]  126.9,99.47 90 top
RN13  10K  [0603-ARC]  61.06,154.82 0 top
RN14  100  [0603-ARC]  49.99,169.43 0 top
RN15  10K  [0603-ARC]  24.38,158.81 90 top
RN16  10K  [0603-ARC]  163.58,154.82 0 top
RN17  100  [0603-ARC]  152.51,169.43 0 top
RN18  10K  [0603-ARC]  126.9,158.81 90 top
RN19  10K  [0603-ARC]  61.06,214.17 0 top
RN20  100  [0603-ARC]  49.99,228.77 0 top
RN21  10K  [0603-ARC]  24.38,218.15 90 top
RN22  10K  [0603-ARC]  163.58,214.17 0 top
RN23  100  [0603-ARC]  152.51,228.77 0 top
RN24  10K  [0603-ARC]  126.9,218.15 90 top
RS1  TEST-POINT3X4  [PAD.03X.04]  125.86,57.28 0 top
RS2  TEST-POINT3X4  [PAD.03X.04]  23.34,116.62 0 top
RS3  TEST-POINT3X4  [PAD.03X.04]  125.86,116.62 0 top
RS4  TEST-POINT3X4  [PAD.03X.04]  23.34,175.96 0 top
RS5  TEST-POINT3X4  [PAD.03X.04]  125.86,175.96 0 top
RS6  TEST-POINT3X4  [PAD.03X.04]  23.34,235.3 0 top
RS7  TEST-POINT3X4  [PAD.03X.04]  125.86,235.3 0 top
RS232  TEST-POINT3X4  [PAD.03X.04]  23.34,57.28 0 top
RTS  TEST-POINT3X4  [PAD.03X.04]  24.83,57.28 0 top
RTS1  TEST-POINT3X4  [PAD.03X.04]  127.35,57.28 0 top
RTS2  TEST-POINT3X4  [PAD.03X.04]  24.83,116.62 0 top
RTS3  TEST-POINT3X4  [PAD.03X.04]  127.35,116.62 0 top
RTS4  TEST-POINT3X4  [PAD.03X.04]  24.83,175.96 0 top
RTS5  TEST-POINT3X4  [PAD.03X.04]  127.35,175.96 0 top
RTS6  TEST-POINT3X4  [PAD.03X.04]  24.83,235.3 0 top
RTS7  TEST-POINT3X4  [PAD.03X.04]  127.35,235.3 0 top
RX  GRN  [CHIP-LED0603]  38.15,51.04 90 top
RX1  GRN  [CHIP-LED0603]  140.67,51.04 90 top
RX2  GRN  [CHIP-LED0603]  38.15,110.38 90 top
RX3  GRN  [CHIP-LED0603]  140.67,110.38 90 top
RX4  GRN  [CHIP-LED0603]  38.15,169.72 90 top
RX5  GRN  [CHIP-LED0603]  140.67,169.72 90 top
RX6  GRN  [CHIP-LED0603]  38.15,229.06 90 top
RX7  GRN  [CHIP-LED0603]  140.67,229.06 90 top
S1  MOMENTARY-SWITCH-SPST-SMD-5.2-REDUNDANT  [TACTILE_SWITCH_SMD_5.2MM]  99.92,18.9 90 top
S2  MOMENTARY-SWITCH-SPST-SMD-5.2-REDUNDANT  [TACTILE_SWITCH_SMD_5.2MM]  92.61,18.9 90 top
S3  MOMENTARY-SWITCH-SPST-SMD-5.2-REDUNDANT  [TACTILE_SWITCH_SMD_5.2MM]  24.46,62 0 top
S4  MOMENTARY-SWITCH-SPST-SMD-5.2-REDUNDANT  [TACTILE_SWITCH_SMD_5.2MM]  84.76,18.9 90 top
S5  MOMENTARY-SWITCH-SPST-SMD-5.2-REDUNDANT  [TACTILE_SWITCH_SMD_5.2MM]  202.44,18.9 90 top
S6  MOMENTARY-SWITCH-SPST-SMD-5.2-REDUNDANT  [TACTILE_SWITCH_SMD_5.2MM]  195.13,18.9 90 top
S7  MOMENTARY-SWITCH-SPST-SMD-5.2-REDUNDANT  [TACTILE_SWITCH_SMD_5.2MM]  126.98,62 0 top
S8  MOMENTARY-SWITCH-SPST-SMD-5.2-REDUNDANT  [TACTILE_SWITCH_SMD_5.2MM]  187.28,18.9 90 top
S9  MOMENTARY-SWITCH-SPST-SMD-5.2-REDUNDANT  [TACTILE_SWITCH_SMD_5.2MM]  99.92,78.24 90 top
S10  MOMENTARY-SWITCH-SPST-SMD-5.2-REDUNDANT  [TACTILE_SWITCH_SMD_5.2MM]  92.61,78.24 90 top
S11  MOMENTARY-SWITCH-SPST-SMD-5.2-REDUNDANT  [TACTILE_SWITCH_SMD_5.2MM]  24.46,121.34 0 top
S12  MOMENTARY-SWITCH-SPST-SMD-5.2-REDUNDANT  [TACTILE_SWITCH_SMD_5.2MM]  84.76,78.24 90 top
S13  MOMENTARY-SWITCH-SPST-SMD-5.2-REDUNDANT  [TACTILE_SWITCH_SMD_5.2MM]  202.44,78.24 90 top
S14  MOMENTARY-SWITCH-SPST-SMD-5.2-REDUNDANT  [TACTILE_SWITCH_SMD_5.2MM]  195.13,78.24 90 top
S15  MOMENTARY-SWITCH-SPST-SMD-5.2-REDUNDANT  [TACTILE_SWITCH_SMD_5.2MM]  126.98,121.34 0 top
S16  MOMENTARY-SWITCH-SPST-SMD-5.2-REDUNDANT  [TACTILE_SWITCH_SMD_5.2MM]  187.28,78.24 90 top
S17  MOMENTARY-SWITCH-SPST-SMD-5.2-REDUNDANT  [TACTILE_SWITCH_SMD_5.2MM]  99.92,137.58 90 top
S18  MOMENTARY-SWITCH-SPST-SMD-5.2-REDUNDANT  [TACTILE_SWITCH_SMD_5.2MM]  92.61,137.58 90 top
S19  MOMENTARY-SWITCH-SPST-SMD-5.2-REDUNDANT  [TACTILE_SWITCH_SMD_5.2MM]  24.46,180.68 0 top
S20  MOMENTARY-SWITCH-SPST-SMD-5.2-REDUNDANT  [TACTILE_SWITCH_SMD_5.2MM]  84.76,137.58 90 top
S21  MOMENTARY-SWITCH-SPST-SMD-5.2-REDUNDANT  [TACTILE_SWITCH_SMD_5.2MM]  202.44,137.58 90 top
S22  MOMENTARY-SWITCH-SPST-SMD-5.2-REDUNDANT  [TACTILE_SWITCH_SMD_5.2MM]  195.13,137.58 90 top
S23  MOMENTARY-SWITCH-SPST-SMD-5.2-REDUNDANT  [TACTILE_SWITCH_SMD_5.2MM]  126.98,180.68 0 top
S24  MOMENTARY-SWITCH-SPST-SMD-5.2-REDUNDANT  [TACTILE_SWITCH_SMD_5.2MM]  187.28,137.58 90 top
S25  MOMENTARY-SWITCH-SPST-SMD-5.2-REDUNDANT  [TACTILE_SWITCH_SMD_5.2MM]  99.92,196.92 90 top
S26  MOMENTARY-SWITCH-SPST-SMD-5.2-REDUNDANT  [TACTILE_SWITCH_SMD_5.2MM]  92.61,196.92 90 top
S27  MOMENTARY-SWITCH-SPST-SMD-5.2-REDUNDANT  [TACTILE_SWITCH_SMD_5.2MM]  24.46,240.02 0 top
S28  MOMENTARY-SWITCH-SPST-SMD-5.2-REDUNDANT  [TACTILE_SWITCH_SMD_5.2MM]  84.76,196.92 90 top
S29  MOMENTARY-SWITCH-SPST-SMD-5.2-REDUNDANT  [TACTILE_SWITCH_SMD_5.2MM]  202.44,196.92 90 top
S30  MOMENTARY-SWITCH-SPST-SMD-5.2-REDUNDANT  [TACTILE_SWITCH_SMD_5.2MM]  195.13,196.92 90 top
S31  MOMENTARY-SWITCH-SPST-SMD-5.2-REDUNDANT  [TACTILE_SWITCH_SMD_5.2MM]  126.98,240.02 0 top
S32  MOMENTARY-SWITCH-SPST-SMD-5.2-REDUNDANT  [TACTILE_SWITCH_SMD_5.2MM]  187.28,196.92 90 top
TX  GRN  [CHIP-LED0603]  38.15,52.6 90 top
TX1  GRN  [CHIP-LED0603]  140.67,52.6 90 top
TX2  GRN  [CHIP-LED0603]  38.15,111.94 90 top
TX3  GRN  [CHIP-LED0603]  140.67,111.94 90 top
TX4  GRN  [CHIP-LED0603]  38.15,171.28 90 top
TX5  GRN  [CHIP-LED0603]  140.67,171.28 90 top
TX6  GRN  [CHIP-LED0603]  38.15,230.62 90 top
TX7  GRN  [CHIP-LED0603]  140.67,230.62 90 top
U1  LP2985-33DBVR  [SOT95P280X145-5N]  31.22,33.35 0 top
U2  ARDUINOR3-DIMENSION  [ARDUINOR3]  12.32,12.32 0 top
U3  LP2985-33DBVR  [SOT95P280X145-5N]  133.74,33.35 0 top
U4  ARDUINOR3-DIMENSION  [ARDUINOR3]  114.84,12.32 0 top
U5  NCP1117  [SOT223]  121.19,35.18 90 top
U6  LMV358  [SO08]  132.97,39.65 270 top
U7  LP2985-33DBVR  [SOT95P280X145-5N]  31.22,92.69 0 top
U8  NCP1117  [SOT223]  18.67,35.18 90 top
U9  LMV358  [SO08]  30.45,39.65 270 top
U10  ARDUINOR3-DIMENSION  [ARDUINOR3]  12.32,71.66 0 top
U11  NCP1117  [SOT223]  18.67,94.52 90 top
U12  LMV358  [SO08]  30.45,98.99 270 top
U13  LP2985-33DBVR  [SOT95P280X145-5N]  133.74,92.69 0 top
U14  ARDUINOR3-DIMENSION  [ARDUINOR3]  114.84,71.66 0 top
U15  NCP1117  [SOT223]  121.19,94.52 90 top
U16  LMV358  [SO08]  132.97,98.99 270 top
U17  LP2985-33DBVR  [SOT95P280X145-5N]  31.22,152.03 0 top
U18  ARDUINOR3-DIMENSION  [ARDUINOR3]  12.32,131 0 top
U19  NCP1117  [SOT223]  18.67,153.86 90 top
U20  LMV358  [SO08]  30.45,158.33 270 top
U21  LP2985-33DBVR  [SOT95P280X145-5N]  133.74,152.03 0 top
U22  ARDUINOR3-DIMENSION  [ARDUINOR3]  114.84,131 0 top
U23  NCP1117  [SOT223]  121.19,153.86 90 top
U24  LMV358  [SO08]  132.97,158.33 270 top
U25  LP2985-33DBVR  [SOT95P280X145-5N]  31.22,211.37 0 top
U26  ARDUINOR3-DIMENSION  [ARDUINOR3]  12.32,190.34 0 top
U27  NCP1117  [SOT223]  18.67,213.2 90 top
U28  LMV358  [SO08]  30.45,217.67 270 top
U29  LP2985-33DBVR  [SOT95P280X145-5N]  133.74,211.37 0 top
U30  ARDUINOR3-DIMENSION  [ARDUINOR3]  114.84,190.34 0 top
U31  NCP1117  [SOT223]  121.19,213.2 90 top
U32  LMV358  [SO08]  132.97,217.67 270 top
U$1  CH340G  [SOIC16]  26.44,52.32 0 top
U$2  CH340G  [SOIC16]  128.96,52.32 0 top
U$3  CH340G  [SOIC16]  26.44,111.66 0 top
U$4  CH340G  [SOIC16]  128.96,111.66 0 top
U$5  CH340G  [SOIC16]  26.44,171 0 top
U$6  CH340G  [SOIC16]  128.96,171 0 top
U$7  CH340G  [SOIC16]  26.44,230.34 0 top
U$8  CH340G  [SOIC16]  128.96,230.34 0 top

## Library data of the parts
C1 C7 C25 C37 C49 C61 C73 C85 = SparkFun-Capacitors; MPN: C1608X5R1E105K080AC; OC_NEWARK: 90R7677; PROD_ID: CAP-00868
C2 C3 C18 C19 C30 C31 C42 C43 C54 C55 C66 C67 C78 C79 C90 C91 = SparkFun-Capacitors; MF: FARNELL; MPN: CC0402JRNPO9BN150; OC_NEWARK: 69C9582; PROD_ID: CAP-13063
C4 C20 C32 C44 C56 C68 C80 C92 = SparkFun-Capacitors; MPN: C0603C103K1RACTU; OC_NEWARK: 29T8974; PROD_ID: CAP-00867
C5 C6 C8 C13 C17 C21-C23 C29 C33-C35 C41 C45-C47 C53 C57-C59 C65 C69-C71 C77 C81-C83 C89 C93-C95 = rcl; SPICEPREFIX: C
C9 C24 C36 C48 C60 C72 C84 C96 = Arduino Modificable_2; MPN: C0603C103J1RACTU; OC_NEWARK: 07X0751
C10 C11 C14 C15 C26 C27 C38 C39 C50 C51 C62 C63 C74 C75 C86 C87 = SparkFun-Capacitors; MPN: EEE-1CA470WR; OC_NEWARK: 53W3779; PROD_ID: CAP-08478
C12 C16 C28 C40 C52 C64 C76 C88 = SparkFun-Capacitors; MPN: C0603C103J1RACTU; OC_NEWARK: 07X0751; PROD_ID: CAP-12416
CTS CTS1-CTS7 DCD DCD1-DCD7 DSR DSR1-DSR7 RI RI1-RI7 RS1-RS7 RS232 RTS RTS1-RTS7 = SparkFun-Connectors
D1 D4 D6 D8 D10 D12 D13 D15 PWR PWR1-PWR7 RX RX1-RX7 TX TX1-TX7 = led; MPN: HSME-C191; OC_NEWARK: 05M0345
D2 D3 D5 D7 D9 D11 D14 D16 = M7; AVAILABILITY: Unavailable; MP: M7; MPN: RFN1LAM7STFTR; OC_NEWARK: 58AC3694; PACKAGE: DO-214 Diodes Inc.; PRICE: 0.01 USD
F1-F16 = testpad
FUSE FUSE1-FUSE7 = Tonche_Library
GPIO GPIO1-GPIO7 = SparkFun-Connectors; PROD_ID: CONN-08499; SF_ID: PRT-0778
IC1-IC8 = microchip; MF: MICROCHIP; MPN: PIC18F4550-I/P; OC_FARNELL: 9321357; OC_NEWARK: 74K8623
ICSP ICSP1-ICSP7 POWER POWER1-POWER7 = SparkFun-Connectors; PROD_ID: CONN-11566
J1 J3 J4 J6 J9 J11 J13 J15 = MICRO-B_MOLEX_105017-0001; AVAILABILITY: Unavailable; DESCRIPTION: Conn USB Type B M 5 POS 0.65mm Solder RA Thru-Hole 5 Terminal 1 Port Embossed T/R; MF: Molex; MP: 105017-0001; PACKAGE: None; PRICE: None
J2 J5 J7 J8 J10 J12 J14 J16 = SparkFun-Connectors; MPN: FC681465P; OC_NEWARK: 20T2054; PROD_ID: CONN-08197
Q1 Q2 Q4 Q5 Q7 Q8 Q10 Q11 Q13 Q14 Q16 Q17 Q19 Q20 Q22 Q23 = crystal
Q3 Q6 Q9 Q12 Q15 Q18 Q21 Q24 = SMD-MOSFET-P-CH-20V-2A_SOT-23_; AVAILABILITY: Good; DESCRIPTION: Single P-Channel 20V 70 mOhm Logic Level PowerTrench Mosfet SSOT-3; MF: FAIRCHILD SEMICONDUCTOR; MP: FDN340P; MPN: FDN340P; OC_NEWARK: 58K8841; PACKAGE: SC-59 ON Semiconductor; PRICE: 0.19 USD
R1 R5 R6 R8 R12 R13 R15 R19 R20 R22 R26 R27 R29 R33 R34 R36 R40 R41 R43 R47 R48 R50 R54 R55 = eagle-ltspice; MPN: ERJ-6GEYJ331V; OC_NEWARK: 65T8817; SPICEMODEL: NONE; SPICEPREFIX: R
R2 R3 R9 R10 R16 R17 R23 R24 R30 R31 R37 R38 R44 R45 R51 R52 = eagle-ltspice; MPN: EXB-V8V103JV; OC_NEWARK: 65T8998; SPICEMODEL: NONE; SPICEPREFIX: R
R4 R11 R18 R25 R32 R39 R46 R53 U2 U4 U10 U14 U18 U22 U26 U30 = Arduino Modificable_2
R7 R14 R21 R28 R35 R42 R49 R56 = eagle-ltspice; MPN: ERJ-6GEYJ471V; OC_NEWARK: 65T8826; SPICEMODEL: NONE; SPICEPREFIX: R
RN1 RN3 RN4 RN6 RN7 RN9 RN10 RN12 RN13 RN15 RN16 RN18 RN19 RN21 RN22 RN24 = resistor-dil; MPN: EXB-V8V103JV; OC_FARNELL: unknown; OC_NEWARK: 65T8998
RN2 RN5 RN8 RN11 RN14 RN17 RN20 RN23 = resistor-dil; OC_FARNELL: unknown; OC_NEWARK: unknown
S1-S32 = SparkFun-Switches; MPN: TL3301AF160QG; OC_NEWARK: 15N4497; PROD_ID: SWCH-08247; SF_SKU: COM-08720
U1 U3 U7 U13 U17 U21 U25 U29 = LP2985-33DBVR; AVAILABILITY: Good; DESCRIPTION: Single Output LDO, 150mA, Fixed_3.3V_, 1.5% Tolerance, Low Quiescent Current, Low Noise 5-SOT-23 -40 to 125; MF: TEXAS INSTRUMENTS; MP: LP2985-33DBVR; MPN: LP2985-33DBVR; OC_NEWARK: 43J9346; PACKAGE: SOT-23-5 Texas Instruments; PRICE: 0.39 USD
U5 U8 U11 U15 U19 U23 U27 U31 = NCP1117; AVAILABILITY: Unavailable; MF: ON SEMICONDUCTOR; MP: NCP1117; MPN: NCP1117ST50T3G; OC_NEWARK: 71J6563; PACKAGE: None; PRICE: None
U6 U9 U12 U16 U20 U24 U28 U32 = SparkFun-IC-Amplifiers; MF: FAIRCHILD SEMICONDUCTOR; MPN: LMV358AM8X; OC_NEWARK: 29H0537; PROD_ID: IC-09657
U$1-U$8 = ch340g

## Nets
A0 [SIGNAL3V3]: IC1.2 U2.A0
A1 [SIGNAL3V3]: IC1.3 U2.A1
A2 [SIGNAL3V3]: IC1.4 U2.A2
A3 [SIGNAL3V3]: IC1.5 U2.A3 U2.AREF
A4: IC1.7 U2.A4
A5 [SIGNAL3V3]: IC2.2 U4.A0
A6 [SIGNAL3V3]: IC2.3 U4.A1
A7 [SIGNAL3V3]: IC2.4 U4.A2
A8 [SIGNAL3V3]: IC2.5 U4.A3 U4.AREF
A9: IC2.7 U4.A4
A10 [SIGNAL3V3]: IC3.2 U10.A0
A11 [SIGNAL3V3]: IC3.3 U10.A1
A12 [SIGNAL3V3]: IC3.4 U10.A2
A13 [SIGNAL3V3]: IC3.5 U10.A3 U10.AREF
A14: IC3.7 U10.A4
A15 [SIGNAL3V3]: IC4.2 U14.A0
A16 [SIGNAL3V3]: IC4.3 U14.A1
A17 [SIGNAL3V3]: IC4.4 U14.A2
A18 [SIGNAL3V3]: IC4.5 U14.A3 U14.AREF
A19: IC4.7 U14.A4
A20 [SIGNAL3V3]: IC5.2 U18.A0
A21 [SIGNAL3V3]: IC5.3 U18.A1
A22 [SIGNAL3V3]: IC5.4 U18.A2
A23 [SIGNAL3V3]: IC5.5 U18.A3 U18.AREF
A24: IC5.7 U18.A4
A25 [SIGNAL3V3]: IC6.2 U22.A0
A26 [SIGNAL3V3]: IC6.3 U22.A1
A27 [SIGNAL3V3]: IC6.4 U22.A2
A28 [SIGNAL3V3]: IC6.5 U22.A3 U22.AREF
A29: IC6.7 U22.A4
A30 [SIGNAL3V3]: IC7.2 U26.A0
A31 [SIGNAL3V3]: IC7.3 U26.A1
A32 [SIGNAL3V3]: IC7.4 U26.A2
A33 [SIGNAL3V3]: IC7.5 U26.A3 U26.AREF
A34: IC7.7 U26.A4
A35 [SIGNAL3V3]: IC8.2 U30.A0
A36 [SIGNAL3V3]: IC8.3 U30.A1
A37 [SIGNAL3V3]: IC8.4 U30.A2
A38 [SIGNAL3V3]: IC8.5 U30.A3 U30.AREF
A39: IC8.7 U30.A4
BUFF [SIGNAL3V3]: R1.2 U9.6 U9.7
BUFF1 [SIGNAL3V3]: R8.2 U6.6 U6.7
BUFF2 [SIGNAL3V3]: R15.2 U12.6 U12.7
BUFF3 [SIGNAL3V3]: R22.2 U16.6 U16.7
BUFF4 [SIGNAL3V3]: R29.2 U20.6 U20.7
BUFF5 [SIGNAL3V3]: R36.2 U24.6 U24.7
BUFF6 [SIGNAL3V3]: R43.2 U28.6 U28.7
BUFF7 [SIGNAL3V3]: R50.2 U32.6 U32.7
BYPS: C4.1 U1.4
BYPS1: C20.1 U3.4
BYPS2: C32.1 U7.4
BYPS3: C44.1 U13.4
BYPS4: C56.1 U17.4
BYPS5: C68.1 U21.4
BYPS6: C80.1 U25.4
BYPS7: C92.1 U29.4
COMP: RN3.3 RN3.4 U9.3
COMP1: RN6.3 RN6.4 U6.3
COMP2: RN9.3 RN9.4 U12.3
COMP3: RN12.3 RN12.4 U16.3
COMP4: RN15.3 RN15.4 U20.3
COMP5: RN18.3 RN18.4 U24.3
COMP6: RN21.3 RN21.4 U28.3
COMP7: RN24.3 RN24.4 U32.3
CTS: CTS.P$1 U$1.9
CTS1: CTS1.P$1 U$2.9
CTS2: CTS2.P$1 U$3.9
CTS3: CTS3.P$1 U$4.9
CTS4: CTS4.P$1 U$5.9
CTS5: CTS5.P$1 U$6.9
CTS6: CTS6.P$1 U$7.9
CTS7: CTS7.P$1 U$8.9
D1 [SIGNAL3V3]: GPIO1.9 IC2.29
D2 [SIGNAL3V3]: IC1.24 U2.D2
D3 [SIGNAL3V3]: IC1.23 U2.D3
D4 [SIGNAL3V3]: IC1.18 U2.D4
D5: IC1.17 U2.D5
D6 [SIGNAL3V3]: IC1.16 U2.D6
D7 [SIGNAL3V3]: IC1.15 U2.D7
D8: IC1.33 U2.D8
D9: IC1.34 U2.D9
D10: IC1.35 U2.D10
D11: RN2.5 U2.D11
D12 [SIGNAL3V3]: IC1.37 U2.D12
D13 [SIGNAL3V3]: IC1.38 U2.D13 U9.5
D13LED [SIGNALPIC]: D13.A R1.1
D13LED1 [SIGNALPIC]: D1.A R8.1
D13LED2 [SIGNALPIC]: D4.A R15.1
D13LED3 [SIGNALPIC]: D6.A R22.1
D13LED4 [SIGNALPIC]: D8.A R29.1
D13LED5 [SIGNALPIC]: D10.A R36.1
D13LED6 [SIGNALPIC]: D12.A R43.1
D13LED7 [SIGNALPIC]: D15.A R50.1
D14 [SIGNAL3V3]: GPIO.1 RN2.6
D15 [SIGNAL3V3]: GPIO.2 RN2.7
D16: GPIO.3 IC1.19
D17 [SIGNAL3V3]: GPIO.4 IC1.20
D18: GPIO.5 IC1.21
D19 [SIGNAL3V3]: GPIO.6 IC1.22
D20 [SIGNAL3V3]: GPIO.7 IC1.27
D21 [SIGNAL3V3]: GPIO.8 IC1.28
D22 [SIGNAL3V3]: GPIO.9 IC1.29
D23: GPIO.10 IC1.30
D24 [SIGNAL3V3]: IC1.6 U2.A5
D25 [SIGNAL3V3]: GPIO1.8 IC2.28
D26 [SIGNAL3V3]: GPIO1.7 IC2.27
D27 [SIGNAL3V3]: GPIO1.6 IC2.22
D28: GPIO1.5 IC2.21
D29 [SIGNAL3V3]: GPIO1.4 IC2.20
D30: GPIO1.3 IC2.19
D31 [SIGNAL3V3]: IC2.24 U4.D2
D32 [SIGNAL3V3]: IC2.23 U4.D3
D33 [SIGNAL3V3]: IC2.38 U4.D13 U6.5
D34 [SIGNAL3V3]: GPIO1.2 RN5.7
D35 [SIGNAL3V3]: IC2.18 U4.D4
D36: IC2.17 U4.D5
D37 [SIGNAL3V3]: IC2.16 U4.D6
D38 [SIGNAL3V3]: IC2.15 U4.D7
D39: IC2.33 U4.D8
D40: IC2.34 U4.D9
D41: IC2.35 U4.D10
D42: RN5.5 U4.D11
D43 [SIGNAL3V3]: IC2.37 U4.D12
D44 [SIGNAL3V3]: GPIO1.1 RN5.6
D45: GPIO1.10 IC2.30
D46 [SIGNAL3V3]: IC2.6 U4.A5
D47 [SIGNAL3V3]: GPIO2.9 IC3.29
D48 [SIGNAL3V3]: GPIO2.8 IC3.28
D49 [SIGNAL3V3]: GPIO2.7 IC3.27
D50 [SIGNAL3V3]: GPIO2.6 IC3.22
D51: GPIO2.5 IC3.21
D52 [SIGNAL3V3]: GPIO2.4 IC3.20
D53: GPIO2.3 IC3.19
D54 [SIGNAL3V3]: IC3.24 U10.D2
D55 [SIGNAL3V3]: IC3.23 U10.D3
D56 [SIGNAL3V3]: IC3.38 U10.D13 U12.5
D57 [SIGNAL3V3]: GPIO2.2 RN8.7
D58 [SIGNAL3V3]: IC3.18 U10.D4
D59: IC3.17 U10.D5
D60 [SIGNAL3V3]: IC3.16 U10.D6
D61 [SIGNAL3V3]: IC3.15 U10.D7
D62: IC3.33 U10.D8
D63: IC3.34 U10.D9
D64: IC3.35 U10.D10
D65: RN8.5 U10.D11
D66 [SIGNAL3V3]: IC3.37 U10.D12
D67 [SIGNAL3V3]: GPIO2.1 RN8.6
D68: GPIO2.10 IC3.30
D69 [SIGNAL3V3]: IC3.6 U10.A5
D70 [SIGNAL3V3]: GPIO3.9 IC4.29
D71 [SIGNAL3V3]: GPIO3.8 IC4.28
D72 [SIGNAL3V3]: GPIO3.7 IC4.27
D73 [SIGNAL3V3]: GPIO3.6 IC4.22
D74: GPIO3.5 IC4.21
D75 [SIGNAL3V3]: GPIO3.4 IC4.20
D76: GPIO3.3 IC4.19
D77 [SIGNAL3V3]: IC4.24 U14.D2
D78 [SIGNAL3V3]: IC4.23 U14.D3
D79 [SIGNAL3V3]: IC4.38 U14.D13 U16.5
D80 [SIGNAL3V3]: GPIO3.2 RN11.7
D81 [SIGNAL3V3]: IC4.18 U14.D4
D82: IC4.17 U14.D5
D83 [SIGNAL3V3]: IC4.16 U14.D6
D84 [SIGNAL3V3]: IC4.15 U14.D7
D85: IC4.33 U14.D8
D86: IC4.34 U14.D9
D87: IC4.35 U14.D10
D88: RN11.5 U14.D11
D89 [SIGNAL3V3]: IC4.37 U14.D12
D90 [SIGNAL3V3]: GPIO3.1 RN11.6
D91: GPIO3.10 IC4.30
D92 [SIGNAL3V3]: IC4.6 U14.A5
D93 [SIGNAL3V3]: GPIO4.9 IC5.29
D94 [SIGNAL3V3]: GPIO4.8 IC5.28
D95 [SIGNAL3V3]: GPIO4.7 IC5.27
D96 [SIGNAL3V3]: GPIO4.6 IC5.22
D97: GPIO4.5 IC5.21
D98 [SIGNAL3V3]: GPIO4.4 IC5.20
D99: GPIO4.3 IC5.19
D100 [SIGNAL3V3]: IC5.24 U18.D2
D101 [SIGNAL3V3]: IC5.23 U18.D3
D102 [SIGNAL3V3]: IC5.38 U18.D13 U20.5
D103 [SIGNAL3V3]: GPIO4.2 RN14.7
D104 [SIGNAL3V3]: IC5.18 U18.D4
D105: IC5.17 U18.D5
D106 [SIGNAL3V3]: IC5.16 U18.D6
D107 [SIGNAL3V3]: IC5.15 U18.D7
D108: IC5.33 U18.D8
D109: IC5.34 U18.D9
D110: IC5.35 U18.D10
D111: RN14.5 U18.D11
D112 [SIGNAL3V3]: IC5.37 U18.D12
D113 [SIGNAL3V3]: GPIO4.1 RN14.6
D114: GPIO4.10 IC5.30
D115 [SIGNAL3V3]: IC5.6 U18.A5
D116 [SIGNAL3V3]: GPIO5.9 IC6.29
D117 [SIGNAL3V3]: GPIO5.8 IC6.28
D118 [SIGNAL3V3]: GPIO5.7 IC6.27
D119 [SIGNAL3V3]: GPIO5.6 IC6.22
D120: GPIO5.5 IC6.21
D121 [SIGNAL3V3]: GPIO5.4 IC6.20
D122: GPIO5.3 IC6.19
D123 [SIGNAL3V3]: IC6.24 U22.D2
D124 [SIGNAL3V3]: IC6.23 U22.D3
D125 [SIGNAL3V3]: IC6.38 U22.D13 U24.5
D126 [SIGNAL3V3]: GPIO5.2 RN17.7
D127 [SIGNAL3V3]: IC6.18 U22.D4
D128: IC6.17 U22.D5
D129 [SIGNAL3V3]: IC6.16 U22.D6
D130 [SIGNAL3V3]: IC6.15 U22.D7
D131: IC6.33 U22.D8
D132: IC6.34 U22.D9
D133: IC6.35 U22.D10
D134: RN17.5 U22.D11
D135 [SIGNAL3V3]: IC6.37 U22.D12
D136 [SIGNAL3V3]: GPIO5.1 RN17.6
D137: GPIO5.10 IC6.30
D138 [SIGNAL3V3]: IC6.6 U22.A5
D139 [SIGNAL3V3]: GPIO6.9 IC7.29
D140 [SIGNAL3V3]: GPIO6.8 IC7.28
D141 [SIGNAL3V3]: GPIO6.7 IC7.27
D142 [SIGNAL3V3]: GPIO6.6 IC7.22
D143: GPIO6.5 IC7.21
D144 [SIGNAL3V3]: GPIO6.4 IC7.20
D145: GPIO6.3 IC7.19
D146 [SIGNAL3V3]: IC7.24 U26.D2
D147 [SIGNAL3V3]: IC7.23 U26.D3
D148 [SIGNAL3V3]: IC7.38 U26.D13 U28.5
D149 [SIGNAL3V3]: GPIO6.2 RN20.7
D150 [SIGNAL3V3]: IC7.18 U26.D4
D151: IC7.17 U26.D5
D152 [SIGNAL3V3]: IC7.16 U26.D6
D153 [SIGNAL3V3]: IC7.15 U26.D7
D154: IC7.33 U26.D8
D155: IC7.34 U26.D9
D156: IC7.35 U26.D10
D157: RN20.5 U26.D11
D158 [SIGNAL3V3]: IC7.37 U26.D12
D159 [SIGNAL3V3]: GPIO6.1 RN20.6
D160: GPIO6.10 IC7.30
D161 [SIGNAL3V3]: IC7.6 U26.A5
D162 [SIGNAL3V3]: GPIO7.9 IC8.29
D163 [SIGNAL3V3]: GPIO7.8 IC8.28
D164 [SIGNAL3V3]: GPIO7.7 IC8.27
D165 [SIGNAL3V3]: GPIO7.6 IC8.22
D166: GPIO7.5 IC8.21
D167 [SIGNAL3V3]: GPIO7.4 IC8.20
D168: GPIO7.3 IC8.19
D169 [SIGNAL3V3]: IC8.24 U30.D2
D170 [SIGNAL3V3]: IC8.23 U30.D3
D171 [SIGNAL3V3]: IC8.38 U30.D13 U32.5
D172 [SIGNAL3V3]: GPIO7.2 RN23.7
D173 [SIGNAL3V3]: IC8.18 U30.D4
D174: IC8.17 U30.D5
D175 [SIGNAL3V3]: IC8.16 U30.D6
D176 [SIGNAL3V3]: IC8.15 U30.D7
D177: IC8.33 U30.D8
D178: IC8.34 U30.D9
D179: IC8.35 U30.D10
D180: RN23.5 U30.D11
D181 [SIGNAL3V3]: IC8.37 U30.D12
D182 [SIGNAL3V3]: GPIO7.1 RN23.6
D183: GPIO7.10 IC8.30
D184 [SIGNAL3V3]: IC8.6 U30.A5
DATA1: R3.2 R6.1 U$1.2
DATA2: R2.2 U$1.3
DATA3: R9.2 U$2.3
DATA4: R10.2 R13.1 U$2.2
DATA5: R16.2 U$3.3
DATA6: R17.2 R20.1 U$3.2
DATA7: R23.2 U$4.3
DATA8: R24.2 R27.1 U$4.2
DATA9: R30.2 U$5.3
DATA10: R31.2 R34.1 U$5.2
DATA11: R37.2 U$6.3
DATA12: R38.2 R41.1 U$6.2
DATA13: R44.2 U$7.3
DATA14: R45.2 R48.1 U$7.2
DATA15: R51.2 U$8.3
DATA16: R52.2 R55.1 U$8.2
DATARX [SIGNAL3V3]: IC1.26 R3.1 U2.D0
DATARX1 [SIGNAL3V3]: IC2.26 R10.1 U4.D0
DATARX2 [SIGNAL3V3]: IC3.26 R17.1 U10.D0
DATARX3 [SIGNAL3V3]: IC4.26 R24.1 U14.D0
DATARX4 [SIGNAL3V3]: IC5.26 R31.1 U18.D0
DATARX5 [SIGNAL3V3]: IC6.26 R38.1 U22.D0
DATARX6 [SIGNAL3V3]: IC7.26 R45.1 U26.D0
DATARX7 [SIGNAL3V3]: IC8.26 R52.1 U30.D0
DATATX [SIGNAL3V3]: IC1.25 R2.1 R5.1 U2.D1
DATATX1 [SIGNAL3V3]: IC2.25 R9.1 R12.1 U4.D1
DATATX2 [SIGNAL3V3]: IC3.25 R16.1 R19.1 U10.D1
DATATX3 [SIGNAL3V3]: IC4.25 R23.1 R26.1 U14.D1
DATATX4 [SIGNAL3V3]: IC5.25 R30.1 R33.1 U18.D1
DATATX5 [SIGNAL3V3]: IC6.25 R37.1 R40.1 U22.D1
DATATX6 [SIGNAL3V3]: IC7.25 R44.1 R47.1 U26.D1
DATATX7 [SIGNAL3V3]: IC8.25 R51.1 R54.1 U30.D1
DCD: DCD.P$1 U$1.12
DCD1: DCD1.P$1 U$2.12
DCD2: DCD2.P$1 U$3.12
DCD3: DCD3.P$1 U$4.12
DCD4: DCD4.P$1 U$5.12
DCD5: DCD5.P$1 U$6.12
DCD6: DCD6.P$1 U$7.12
DCD7: DCD7.P$1 U$8.12
DSR: DSR.P$1 U$1.10
DSR1: DSR1.P$1 U$2.10
DSR2: DSR2.P$1 U$3.10
DSR3: DSR3.P$1 U$4.10
DSR4: DSR4.P$1 U$5.10
DSR5: DSR5.P$1 U$6.10
DSR6: DSR6.P$1 U$7.10
DSR7: DSR7.P$1 U$8.10
DTR: C9.1 U$1.13
DTR1: C24.1 U$2.13
DTR2: C36.1 U$3.13
DTR3: C48.1 U$4.13
DTR4: C60.1 U$5.13
DTR5: C72.1 U$6.13
DTR6: C84.1 U$7.13
DTR7: C96.1 U$8.13
FUSE: FUSE.1 J3.1
FUSE1: FUSE1.1 J1.1
FUSE2: FUSE2.1 J4.1
FUSE3: FUSE3.1 J6.1
FUSE4: FUSE4.1 J9.1
FUSE5: FUSE5.1 J11.1
FUSE6: FUSE6.1 J13.1
FUSE7: FUSE7.1 J15.1
GATE_CMD [SIGNAL]: Q3.1 U9.1
GATE_CMD1 [SIGNAL]: Q6.1 U6.1
GATE_CMD2 [SIGNAL]: Q9.1 U12.1
GATE_CMD3 [SIGNAL]: Q12.1 U16.1
GATE_CMD4 [SIGNAL]: Q15.1 U20.1
GATE_CMD5 [SIGNAL]: Q18.1 U24.1
GATE_CMD6 [SIGNAL]: Q21.1 U28.1
GATE_CMD7 [SIGNAL]: Q24.1 U32.1
GND [SIGNALPIC]: C1.2 C2.2 C3.2 C4.2 C5.2 C6.2 C8.2 C10.- C11.- C12.2 C13.2 D13.C IC1.12 IC1.31 ICSP.5 J3.5 J8.GND J8.GNDBREAK POWER.5 POWER.6 PWR.C Q1.2 Q1.4 Q2.2 Q2.4 RN1.5 RN1.6 RN1.7 RN3.5 S3.3 S3.4 U1.2 U2.GND U2.GND1 U2.GND2 U8.1 U9.4 U$1.1
GND1 [SIGNALPIC]: C7.2 C14.- C15.- C16.2 C17.2 C18.2 C19.2 C20.2 C21.2 C22.2 C23.2 D1.C IC2.12 IC2.31 ICSP1.5 J1.5 J2.GND J2.GNDBREAK POWER1.5 POWER1.6 PWR1.C Q4.2 Q4.4 Q5.2 Q5.4 RN4.5 RN4.6 RN4.7 RN6.5 S7.3 S7.4 U3.2 U4.GND U4.GND1 U4.GND2 U5.1 U6.4 U$2.1
GND2 [SIGNALPIC]: C25.2 C26.- C27.- C28.2 C29.2 C30.2 C31.2 C32.2 C33.2 C34.2 C35.2 D4.C IC3.12 IC3.31 ICSP2.5 J4.5 J5.GND J5.GNDBREAK POWER2.5 POWER2.6 PWR2.C Q7.2 Q7.4 Q8.2 Q8.4 RN7.5 RN7.6 RN7.7 RN9.5 S11.3 S11.4 U7.2 U10.GND U10.GND1 U10.GND2 U11.1 U12.4 U$3.1
GND3 [SIGNALPIC]: C37.2 C38.- C39.- C40.2 C41.2 C42.2 C43.2 C44.2 C45.2 C46.2 C47.2 D6.C IC4.12 IC4.31 ICSP3.5 J6.5 J7.GND J7.GNDBREAK POWER3.5 POWER3.6 PWR3.C Q10.2 Q10.4 Q11.2 Q11.4 RN10.5 RN10.6 RN10.7 RN12.5 S15.3 S15.4 U13.2 U14.GND U14.GND1 U14.GND2 U15.1 U16.4 U$4.1
GND4 [SIGNALPIC]: C49.2 C50.- C51.- C52.2 C53.2 C54.2 C55.2 C56.2 C57.2 C58.2 C59.2 D8.C IC5.12 IC5.31 ICSP4.5 J9.5 J10.GND J10.GNDBREAK POWER4.5 POWER4.6 PWR4.C Q13.2 Q13.4 Q14.2 Q14.4 RN13.5 RN13.6 RN13.7 RN15.5 S19.3 S19.4 U17.2 U18.GND U18.GND1 U18.GND2 U19.1 U20.4 U$5.1
GND5 [SIGNALPIC]: C61.2 C62.- C63.- C64.2 C65.2 C66.2 C67.2 C68.2 C69.2 C70.2 C71.2 D10.C IC6.12 IC6.31 ICSP5.5 J11.5 J12.GND J12.GNDBREAK POWER5.5 POWER5.6 PWR5.C Q16.2 Q16.4 Q17.2 Q17.4 RN16.5 RN16.6 RN16.7 RN18.5 S23.3 S23.4 U21.2 U22.GND U22.GND1 U22.GND2 U23.1 U24.4 U$6.1
GND6 [SIGNALPIC]: C73.2 C74.- C75.- C76.2 C77.2 C78.2 C79.2 C80.2 C81.2 C82.2 C83.2 D12.C IC7.12 IC7.31 ICSP6.5 J13.5 J14.GND J14.GNDBREAK POWER6.5 POWER6.6 PWR6.C Q19.2 Q19.4 Q20.2 Q20.4 RN19.5 RN19.6 RN19.7 RN21.5 S27.3 S27.4 U25.2 U26.GND U26.GND1 U26.GND2 U27.1 U28.4 U$7.1
GND7 [SIGNALPIC]: C85.2 C86.- C87.- C88.2 C89.2 C90.2 C91.2 C92.2 C93.2 C94.2 C95.2 D15.C IC8.12 IC8.31 ICSP7.5 J15.5 J16.GND J16.GNDBREAK POWER7.5 POWER7.6 PWR7.C Q22.2 Q22.4 Q23.2 Q23.4 RN22.5 RN22.6 RN22.7 RN24.5 S31.3 S31.4 U29.2 U30.GND U30.GND1 U30.GND2 U31.1 U32.4 U$8.1
LEDRX: R6.2 RX.C
LEDRX1: R13.2 RX1.C
LEDRX2: R20.2 RX2.C
LEDRX3: R27.2 RX3.C
LEDRX4: R34.2 RX4.C
LEDRX5: R41.2 RX5.C
LEDRX6: R48.2 RX6.C
LEDRX7: R55.2 RX7.C
LEDTX: R5.2 TX.C
LEDTX1: R12.2 TX1.C
LEDTX2: R19.2 TX2.C
LEDTX3: R26.2 TX3.C
LEDTX4: R33.2 TX4.C
LEDTX5: R40.2 TX5.C
LEDTX6: R47.2 TX6.C
LEDTX7: R54.2 TX7.C
MCLR: IC1.1 ICSP.1 RN2.8
MCLR1: IC2.1 ICSP1.1 RN5.8
MCLR2: IC3.1 ICSP2.1 RN8.8
MCLR3: IC4.1 ICSP3.1 RN11.8
MCLR4: IC5.1 ICSP4.1 RN14.8
MCLR5: IC6.1 ICSP5.1 RN17.8
MCLR6: IC7.1 ICSP6.1 RN20.8
MCLR7: IC8.1 ICSP7.1 RN23.8
N$1: U4.IOREF
N$2: U10.IOREF
N$3: U14.IOREF
N$4: U18.IOREF
N$5: U22.IOREF
N$6: U2.IOREF
N$7: U26.IOREF
N$8: U30.IOREF
ONLED [SIGNALPIC]: PWR.A R7.1
ONLED1 [SIGNALPIC]: PWR1.A R14.1
ONLED2 [SIGNALPIC]: PWR2.A R21.1
ONLED3 [SIGNALPIC]: PWR3.A R28.1
ONLED4 [SIGNALPIC]: PWR4.A R35.1
ONLED5 [SIGNALPIC]: PWR5.A R42.1
ONLED6 [SIGNALPIC]: PWR6.A R49.1
ONLED7 [SIGNALPIC]: PWR7.A R56.1
OSC1 [SIGNAL3V3]: C2.1 IC1.13 Q1.1 R4.1
OSC2 [SIGNAL3V3]: C3.1 IC1.14 Q1.3 R4.2
OSC3 [SIGNAL3V3]: C18.1 IC2.13 Q4.1 R11.1
OSC4 [SIGNAL3V3]: C19.1 IC2.14 Q4.3 R11.2
OSC5 [SIGNAL3V3]: C30.1 IC3.13 Q7.1 R18.1
OSC6 [SIGNAL3V3]: C31.1 IC3.14 Q7.3 R18.2
OSC7 [SIGNAL3V3]: C42.1 IC4.13 Q10.1 R25.1
OSC8 [SIGNAL3V3]: C43.1 IC4.14 Q10.3 R25.2
OSC9 [SIGNAL3V3]: C54.1 IC5.13 Q13.1 R32.1
OSC10 [SIGNAL3V3]: C55.1 IC5.14 Q13.3 R32.2
OSC11 [SIGNAL3V3]: C66.1 IC6.13 Q16.1 R39.1
OSC12 [SIGNAL3V3]: C67.1 IC6.14 Q16.3 R39.2
OSC13 [SIGNAL3V3]: C78.1 IC7.13 Q19.1 R46.1
OSC14 [SIGNAL3V3]: C79.1 IC7.14 Q19.3 R46.2
OSC15 [SIGNAL3V3]: C90.1 IC8.13 Q22.1 R53.1
OSC16 [SIGNAL3V3]: C91.1 IC8.14 Q22.3 R53.2
PGC [SIGNAL3V3]: IC1.39 ICSP.4 RN2.3
PGC1 [SIGNAL3V3]: IC2.39 ICSP1.4 RN5.3
PGC2 [SIGNAL3V3]: IC3.39 ICSP2.4 RN8.3
PGC3 [SIGNAL3V3]: IC4.39 ICSP3.4 RN11.3
PGC4 [SIGNAL3V3]: IC5.39 ICSP4.4 RN14.3
PGC5 [SIGNAL3V3]: IC6.39 ICSP5.4 RN17.3
PGC6 [SIGNAL3V3]: IC7.39 ICSP6.4 RN20.3
PGC7 [SIGNAL3V3]: IC8.39 ICSP7.4 RN23.3
PGD [SIGNAL3V3]: IC1.40 ICSP.2 RN2.2
PGD1 [SIGNAL3V3]: IC2.40 ICSP1.2 RN5.2
PGD2 [SIGNAL3V3]: IC3.40 ICSP2.2 RN8.2
PGD3 [SIGNAL3V3]: IC4.40 ICSP3.2 RN11.2
PGD4 [SIGNAL3V3]: IC5.40 ICSP4.2 RN14.2
PGD5 [SIGNAL3V3]: IC6.40 ICSP5.2 RN17.2
PGD6 [SIGNAL3V3]: IC7.40 ICSP6.2 RN20.2
PGD7 [SIGNAL3V3]: IC8.40 ICSP7.2 RN23.2
PGM: IC1.36 ICSP.6 RN2.4
PGM1: IC2.36 ICSP1.6 RN5.4
PGM2: IC3.36 ICSP2.6 RN8.4
PGM3: IC4.36 ICSP3.6 RN11.4
PGM4: IC5.36 ICSP4.6 RN14.4
PGM5: IC6.36 ICSP5.6 RN17.4
PGM6: IC7.36 ICSP6.6 RN20.4
PGM7: IC8.36 ICSP7.6 RN23.4
PWRIN [SIGNALPIC]: D2.A J8.PWR
PWRIN1 [SIGNALPIC]: D3.A J2.PWR
PWRIN2 [SIGNALPIC]: D5.A J5.PWR
PWRIN3 [SIGNALPIC]: D7.A J7.PWR
PWRIN4 [SIGNALPIC]: D9.A J10.PWR
PWRIN5 [SIGNALPIC]: D11.A J12.PWR
PWRIN6 [SIGNALPIC]: D14.A J14.PWR
PWRIN7 [SIGNALPIC]: D16.A J16.PWR
RE0: IC1.8 RN1.2 S4.1 S4.2
RE1: IC1.9 RN1.3 S2.1 S2.2
RE2: IC1.10 RN1.4 S1.1 S1.2
RE3: IC2.8 RN4.2 S8.1 S8.2
RE4: IC2.9 RN4.3 S6.1 S6.2
RE5: IC2.10 RN4.4 S5.1 S5.2
RE6: IC3.8 RN7.2 S12.1 S12.2
RE7: IC3.9 RN7.3 S10.1 S10.2
RE8: IC3.10 RN7.4 S9.1 S9.2
RE9: IC4.8 RN10.2 S16.1 S16.2
RE10: IC4.9 RN10.3 S14.1 S14.2
RE11: IC4.10 RN10.4 S13.1 S13.2
RE12: IC5.8 RN13.2 S20.1 S20.2
RE13: IC5.9 RN13.3 S18.1 S18.2
RE14: IC5.10 RN13.4 S17.1 S17.2
RE15: IC6.8 RN16.2 S24.1 S24.2
RE16: IC6.9 RN16.3 S22.1 S22.2
RE17: IC6.10 RN16.4 S21.1 S21.2
RE18: IC7.8 RN19.2 S28.1 S28.2
RE19: IC7.9 RN19.3 S26.1 S26.2
RE20: IC7.10 RN19.4 S25.1 S25.2
RE21: IC8.8 RN22.2 S32.1 S32.2
RE22: IC8.9 RN22.3 S30.1 S30.2
RE23: IC8.10 RN22.4 S29.1 S29.2
RESET [SIGNAL3V3]: C9.2 RN1.1 RN2.1 S3.1 S3.2 U2.RESET
RESET1 [SIGNAL3V3]: C24.2 RN4.1 RN5.1 S7.1 S7.2 U4.RESET
RESET2 [SIGNAL3V3]: C36.2 RN7.1 RN8.1 S11.1 S11.2 U10.RESET
RESET3 [SIGNAL3V3]: C48.2 RN10.1 RN11.1 S15.1 S15.2 U14.RESET
RESET4 [SIGNAL3V3]: C60.2 RN13.1 RN14.1 S19.1 S19.2 U18.RESET
RESET5 [SIGNAL3V3]: C72.2 RN16.1 RN17.1 S23.1 S23.2 U22.RESET
RESET6 [SIGNAL3V3]: C84.2 RN19.1 RN20.1 S27.1 S27.2 U26.RESET
RESET7 [SIGNAL3V3]: C96.2 RN22.1 RN23.1 S31.1 S31.2 U30.RESET
RI: RI.P$1 U$1.11
RI1: RI1.P$1 U$2.11
RI2: RI2.P$1 U$3.11
RI3: RI3.P$1 U$4.11
RI4: RI4.P$1 U$5.11
RI5: RI5.P$1 U$6.11
RI6: RI6.P$1 U$7.11
RI7: RI7.P$1 U$8.11
RS1: RS1.P$1 U$2.15
RS2: RS2.P$1 U$3.15
RS3: RS3.P$1 U$4.15
RS4: RS4.P$1 U$5.15
RS5: RS5.P$1 U$6.15
RS6: RS6.P$1 U$7.15
RS7: RS7.P$1 U$8.15
RS232: RS232.P$1 U$1.15
RTS: RTS.P$1 U$1.14
RTS1: RTS1.P$1 U$2.14
RTS2: RTS2.P$1 U$3.14
RTS3: RTS3.P$1 U$4.14
RTS4: RTS4.P$1 U$5.14
RTS5: RTS5.P$1 U$6.14
RTS6: RTS6.P$1 U$7.14
RTS7: RTS7.P$1 U$8.14
USB_N: J3.2 U$1.6
USB_N1: J1.2 U$2.6
USB_N2: J4.2 U$3.6
USB_N3: J6.2 U$4.6
USB_N4: J9.2 U$5.6
USB_N5: J11.2 U$6.6
USB_N6: J13.2 U$7.6
USB_N7: J15.2 U$8.6
USB_P: J3.3 U$1.5
USB_P1: J1.3 U$2.5
USB_P2: J4.3 U$3.5
USB_P3: J6.3 U$4.5
USB_P4: J9.3 U$5.5
USB_P5: J11.3 U$6.5
USB_P6: J13.3 U$7.5
USB_P7: J15.3 U$8.5
V1: C17.1 U$2.4
V2: C29.1 U$3.4
V3: C13.1 U$1.4
V4: C41.1 U$4.4
V5: C53.1 U$5.4
V5VUSB: FUSE.2 Q3.3
V5VUSB1: FUSE1.2 Q6.3
V5VUSB2: FUSE2.2 Q9.3
V5VUSB3: FUSE3.2 Q12.3
V5VUSB4: FUSE4.2 Q15.3
V5VUSB5: FUSE5.2 Q18.3
V5VUSB6: FUSE6.2 Q21.3
V5VUSB7: FUSE7.2 Q24.3
V6: C65.1 U$6.4
V7: C77.1 U$7.4
V8: C89.1 U$8.4
VCC_1 [SIGNAL3V3]: C7.1 POWER1.1 POWER1.2 U3.5 U4.3V U6.2
VCC_2 [SIGNAL3V3]: C1.1 POWER.1 POWER.2 U1.5 U2.3V U9.2
VCC_3 [SIGNAL3V3]: C25.1 POWER2.1 POWER2.2 U7.5 U10.3V U12.2
VCC_4 [SIGNAL3V3]: C37.1 POWER3.1 POWER3.2 U13.5 U14.3V U16.2
VCC_5 [SIGNAL3V3]: C49.1 POWER4.1 POWER4.2 U17.5 U18.3V U20.2
VCC_6 [SIGNAL3V3]: C61.1 POWER5.1 POWER5.2 U21.5 U22.3V U24.2
VCC_7 [SIGNAL3V3]: C73.1 POWER6.1 POWER6.2 U25.5 U26.3V U28.2
VCC_8 [SIGNAL3V3]: C85.1 POWER7.1 POWER7.2 U29.5 U30.3V U32.2
VDD: C8.1 C11.+ C12.1 IC1.11 IC1.32 ICSP.3 POWER.3 POWER.4 Q3.2 R7.2 RN1.8 RX.A S1.3 S1.4 S2.3 S2.4 S4.3 S4.4 TX.A U1.1 U1.3 U2.5V U8.2 U8.4 U9.8 U$1.16
VDD1: C15.+ C16.1 C23.1 IC2.11 IC2.32 ICSP1.3 POWER1.3 POWER1.4 Q6.2 R14.2 RN4.8 RX1.A S5.3 S5.4 S6.3 S6.4 S8.3 S8.4 TX1.A U3.1 U3.3 U4.5V U5.2 U5.4 U6.8 U$2.16
VDD2: C27.+ C28.1 C35.1 IC3.11 IC3.32 ICSP2.3 POWER2.3 POWER2.4 Q9.2 R21.2 RN7.8 RX2.A S9.3 S9.4 S10.3 S10.4 S12.3 S12.4 TX2.A U7.1 U7.3 U10.5V U11.2 U11.4 U12.8 U$3.16
VDD3: C39.+ C40.1 C47.1 IC4.11 IC4.32 ICSP3.3 POWER3.3 POWER3.4 Q12.2 R28.2 RN10.8 RX3.A S13.3 S13.4 S14.3 S14.4 S16.3 S16.4 TX3.A U13.1 U13.3 U14.5V U15.2 U15.4 U16.8 U$4.16
VDD4: C51.+ C52.1 C59.1 IC5.11 IC5.32 ICSP4.3 POWER4.3 POWER4.4 Q15.2 R35.2 RN13.8 RX4.A S17.3 S17.4 S18.3 S18.4 S20.3 S20.4 TX4.A U17.1 U17.3 U18.5V U19.2 U19.4 U20.8 U$5.16
VDD5: C63.+ C64.1 C71.1 IC6.11 IC6.32 ICSP5.3 POWER5.3 POWER5.4 Q18.2 R42.2 RN16.8 RX5.A S21.3 S21.4 S22.3 S22.4 S24.3 S24.4 TX5.A U21.1 U21.3 U22.5V U23.2 U23.4 U24.8 U$6.16
VDD6: C75.+ C76.1 C83.1 IC7.11 IC7.32 ICSP6.3 POWER6.3 POWER6.4 Q21.2 R49.2 RN19.8 RX6.A S25.3 S25.4 S26.3 S26.4 S28.3 S28.4 TX6.A U25.1 U25.3 U26.5V U27.2 U27.4 U28.8 U$7.16
VDD7: C87.+ C88.1 C95.1 IC8.11 IC8.32 ICSP7.3 POWER7.3 POWER7.4 Q24.2 R56.2 RN22.8 RX7.A S29.3 S29.4 S30.3 S30.4 S32.3 S32.4 TX7.A U29.1 U29.3 U30.5V U31.2 U31.4 U32.8 U$8.16
VIN [SIGNAL3V3]: C10.+ D2.C RN3.6 U2.VIN U8.3
VIN1 [SIGNAL3V3]: C14.+ D3.C RN6.6 U4.VIN U5.3
VIN2 [SIGNAL3V3]: C26.+ D5.C RN9.6 U10.VIN U11.3
VIN3 [SIGNAL3V3]: C38.+ D7.C RN12.6 U14.VIN U15.3
VIN4 [SIGNAL3V3]: C50.+ D9.C RN15.6 U18.VIN U19.3
VIN5 [SIGNAL3V3]: C62.+ D11.C RN18.6 U22.VIN U23.3
VIN6 [SIGNAL3V3]: C74.+ D14.C RN21.6 U26.VIN U27.3
VIN7 [SIGNAL3V3]: C86.+ D16.C RN24.6 U30.VIN U31.3
XI: C5.1 Q2.1 U$1.7
XI1: C21.1 Q5.1 U$2.7
XI2: C33.1 Q8.1 U$3.7
XI3: C45.1 Q11.1 U$4.7
XI4: C57.1 Q14.1 U$5.7
XI5: C69.1 Q17.1 U$6.7
XI6: C81.1 Q20.1 U$7.7
XI7: C93.1 Q23.1 U$8.7
XO: C6.1 Q2.3 U$1.8
XO1: C22.1 Q5.3 U$2.8
XO2: C34.1 Q8.3 U$3.8
XO3: C46.1 Q11.3 U$4.8
XO4: C58.1 Q14.3 U$5.8
XO5: C70.1 Q17.3 U$6.8
XO6: C82.1 Q20.3 U$7.8
XO7: C94.1 Q23.3 U$8.8

## Tracks (layer width: path | path; a pad name or v marks a point on that pad's centre or on a via)
A0
  Top 0.35: U2.A0 63.5,17.02 63.5,22.73 57.53,28.7 46.2,28.7 45.34,29.56 IC1.2
A1
  Top 0.35: U2.A1 64.39,18.67 64.39,23.11 58.04,29.46 48.77,29.46 47.88,30.35 IC1.3
A2
  Bottom 0.35: U2.A2 70.74,16.51 63.12,24.13 57.91,24.13 50.42,31.62 IC1.4
A3  (via drill 0.35)
  Top 0.35: v52.96,40.89 IC1.5
  Bottom 0.35: U2.A3 73.28,16.64 64.14,25.78 58.17,25.78 52.96,30.99 IC1.5 | v52.96,40.89 52.96,43.69 54.23,44.96 54.23,50.55 56.9,53.21 56.9,57.4 55.5,58.8 50.29,58.8 47.88,61.21 39.37,61.21 38.73,61.85 U2.AREF
A4
  Bottom 0.35: U2.A4 75.82,16.64 65.15,27.3 60.67,27.3 58.04,29.94 IC1.7
A5
  Top 0.35: U4.A0 166.02,17.02 166.02,22.73 160.05,28.7 148.72,28.7 147.86,29.56 IC2.2
A6
  Top 0.35: U4.A1 166.91,18.67 166.91,23.11 160.56,29.46 151.29,29.46 150.4,30.35 IC2.3
A7
  Bottom 0.35: U4.A2 173.26,16.51 165.64,24.13 160.43,24.13 152.94,31.62 IC2.4
A8  (via drill 0.35)
  Top 0.35: v155.48,40.89 IC2.5